# Altium PCB caton.PcbDoc (part 1 of 2)
Units mm, origin at the board's own origin, x right, y up, seen from the top; angles counter-clockwise.
Board outline 47.5 x 40.5 mm, 6 copper layers (Signal Layer 1, Signal Layer 2, Signal Layer 3, Signal Layer 4, Signal Layer 5, Signal Layer 6), stack 1.539 mm thick; 76 components, 74 nets, 365 pads, 138 vias.
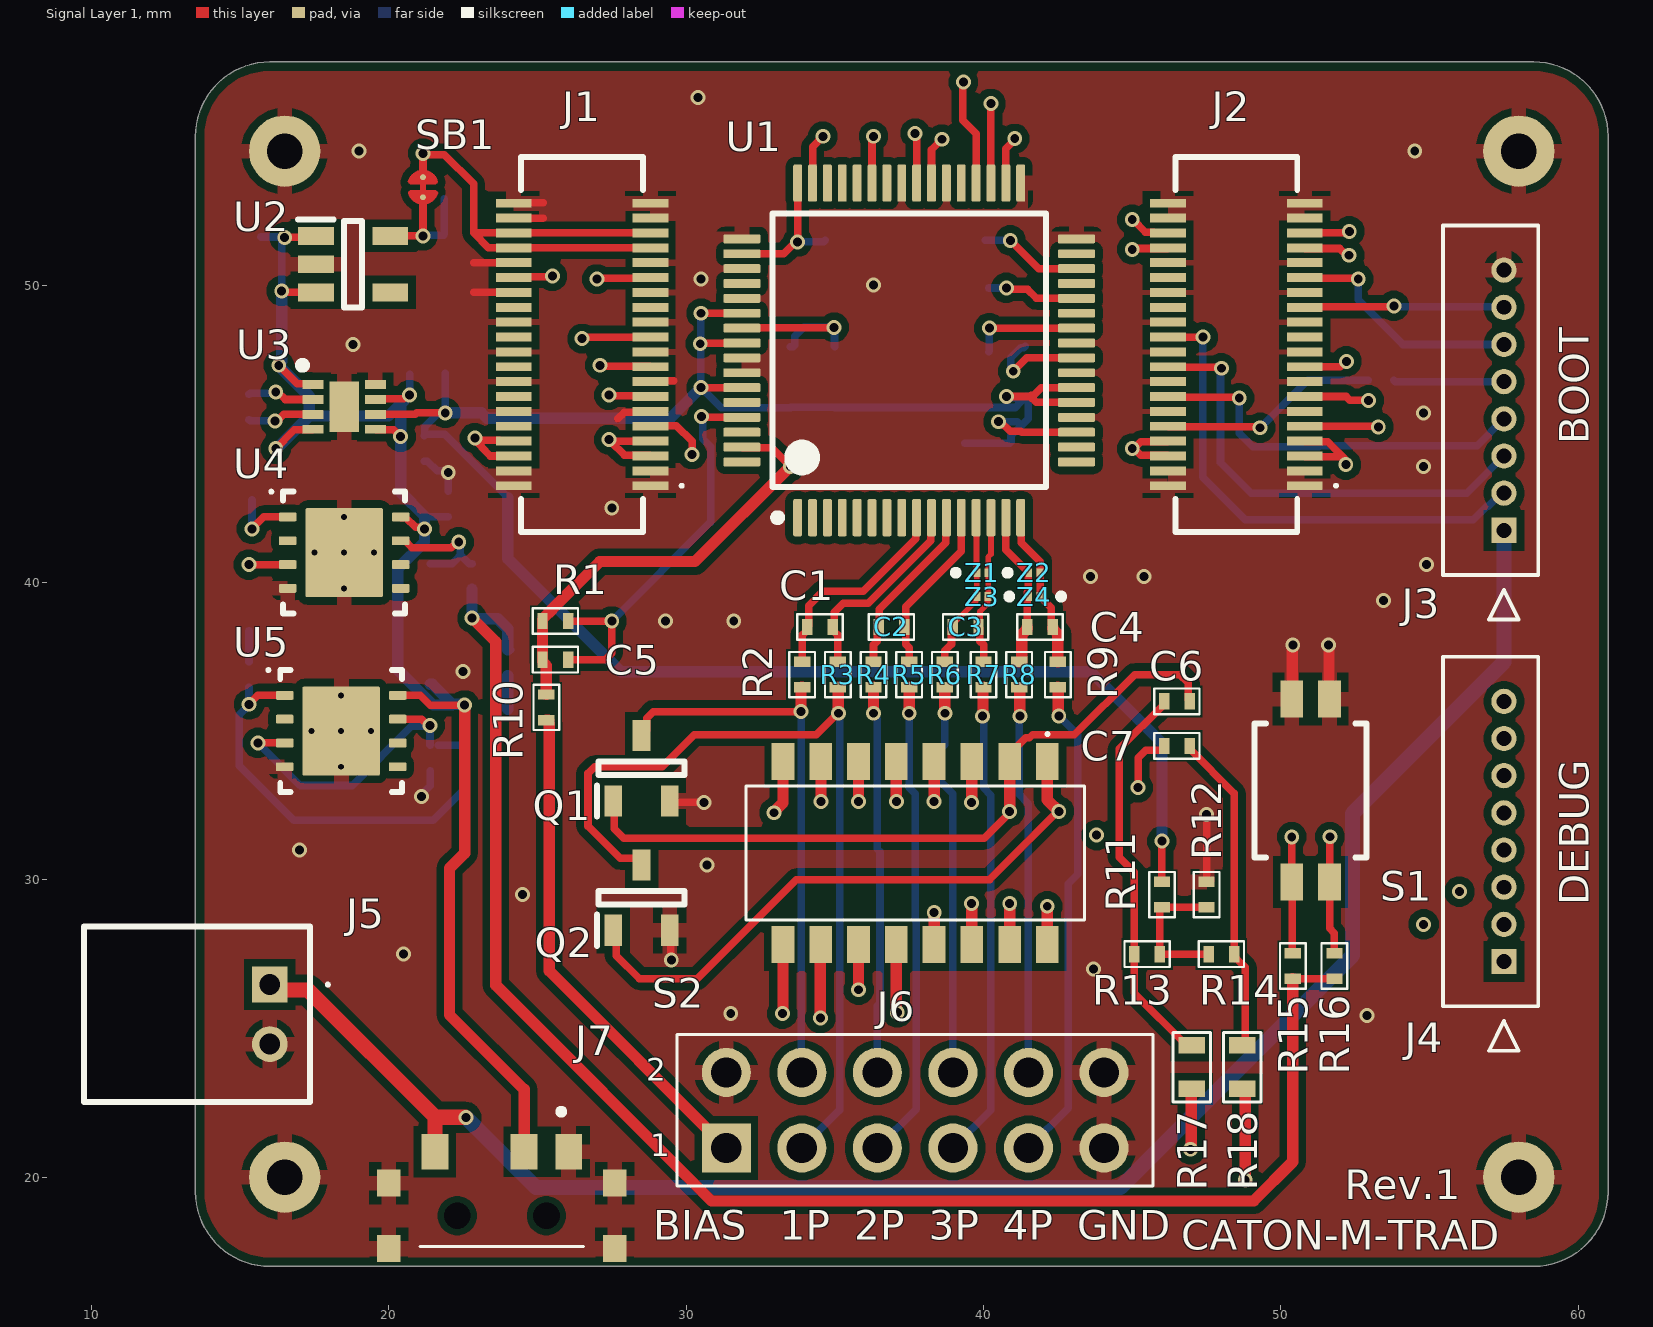
[diagram p0: Signal Layer 1 view]
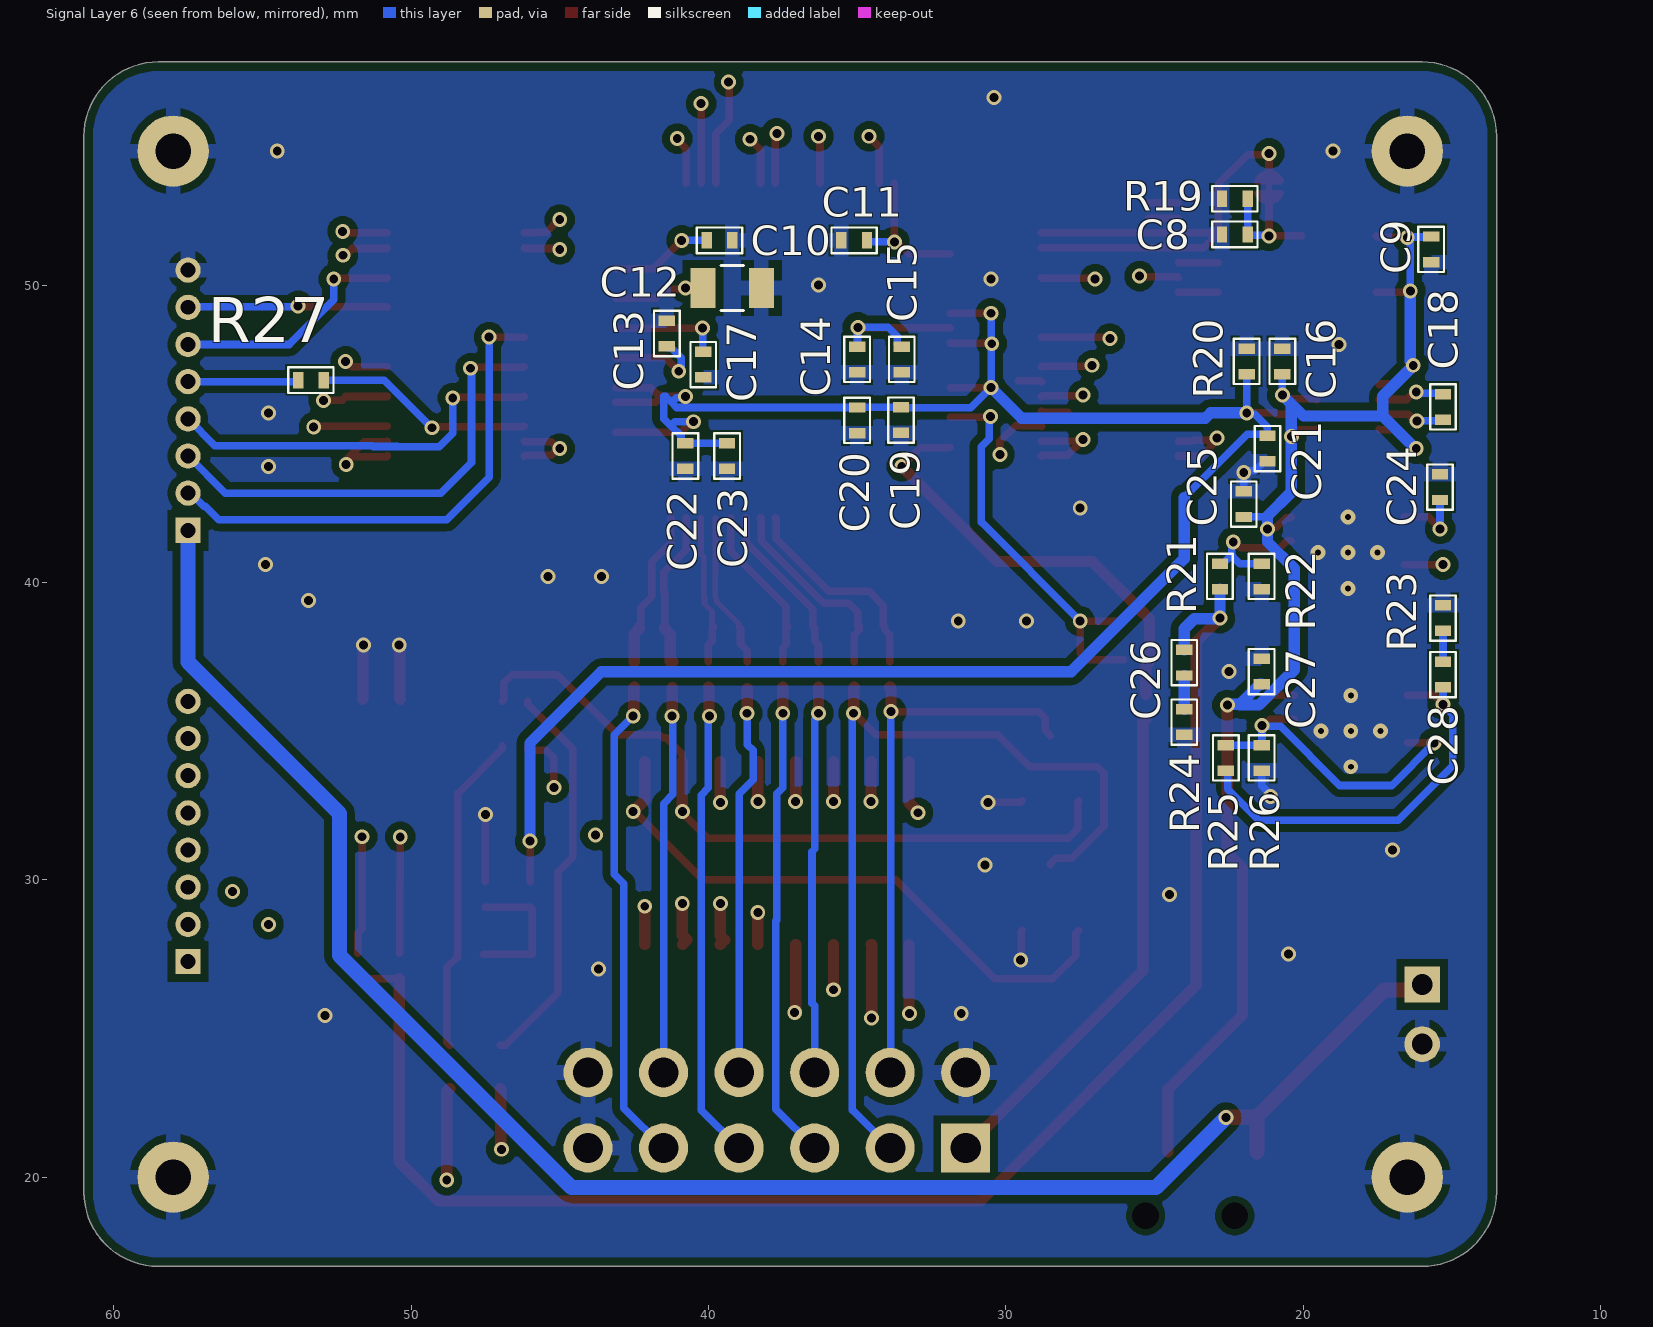
[diagram p1: Signal Layer 6 view, seen from below]
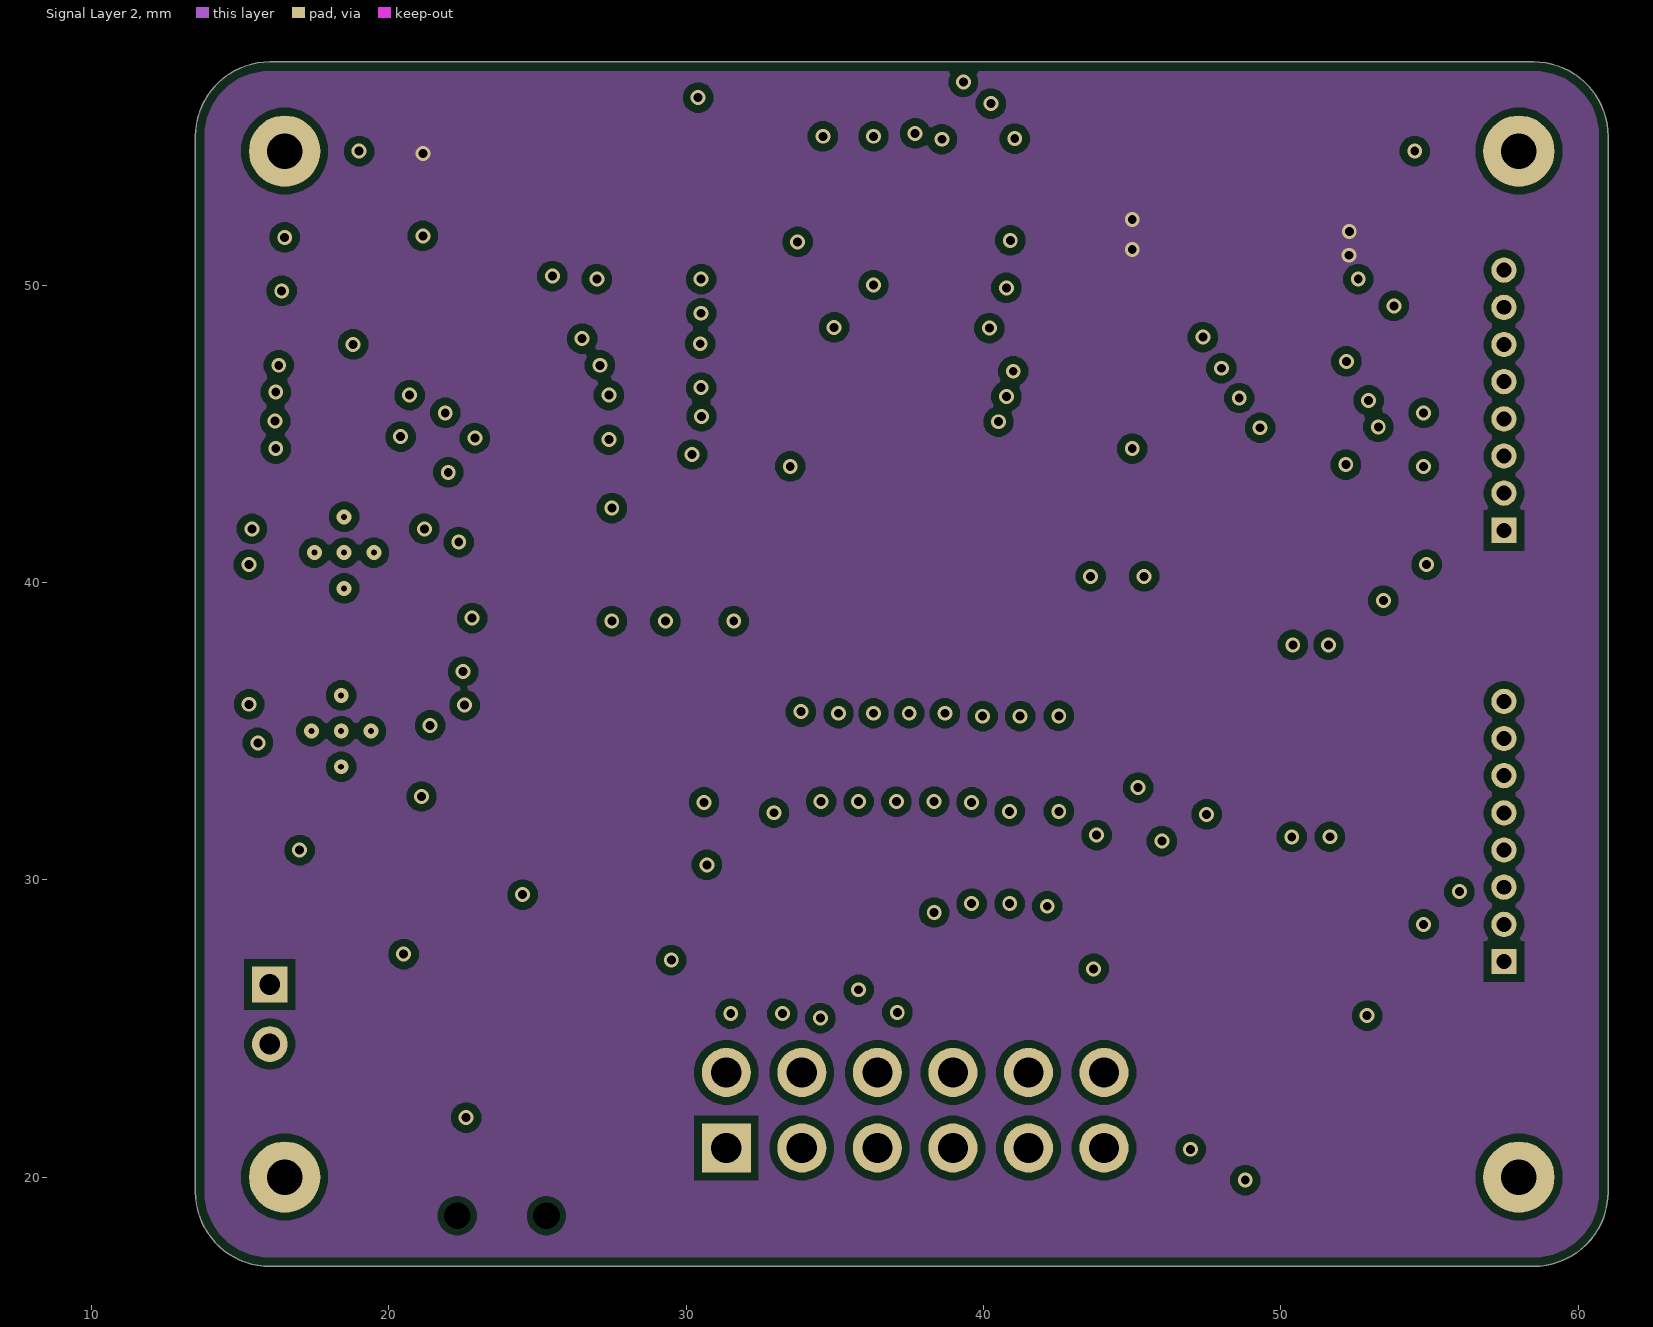
[diagram p2: Signal Layer 2]
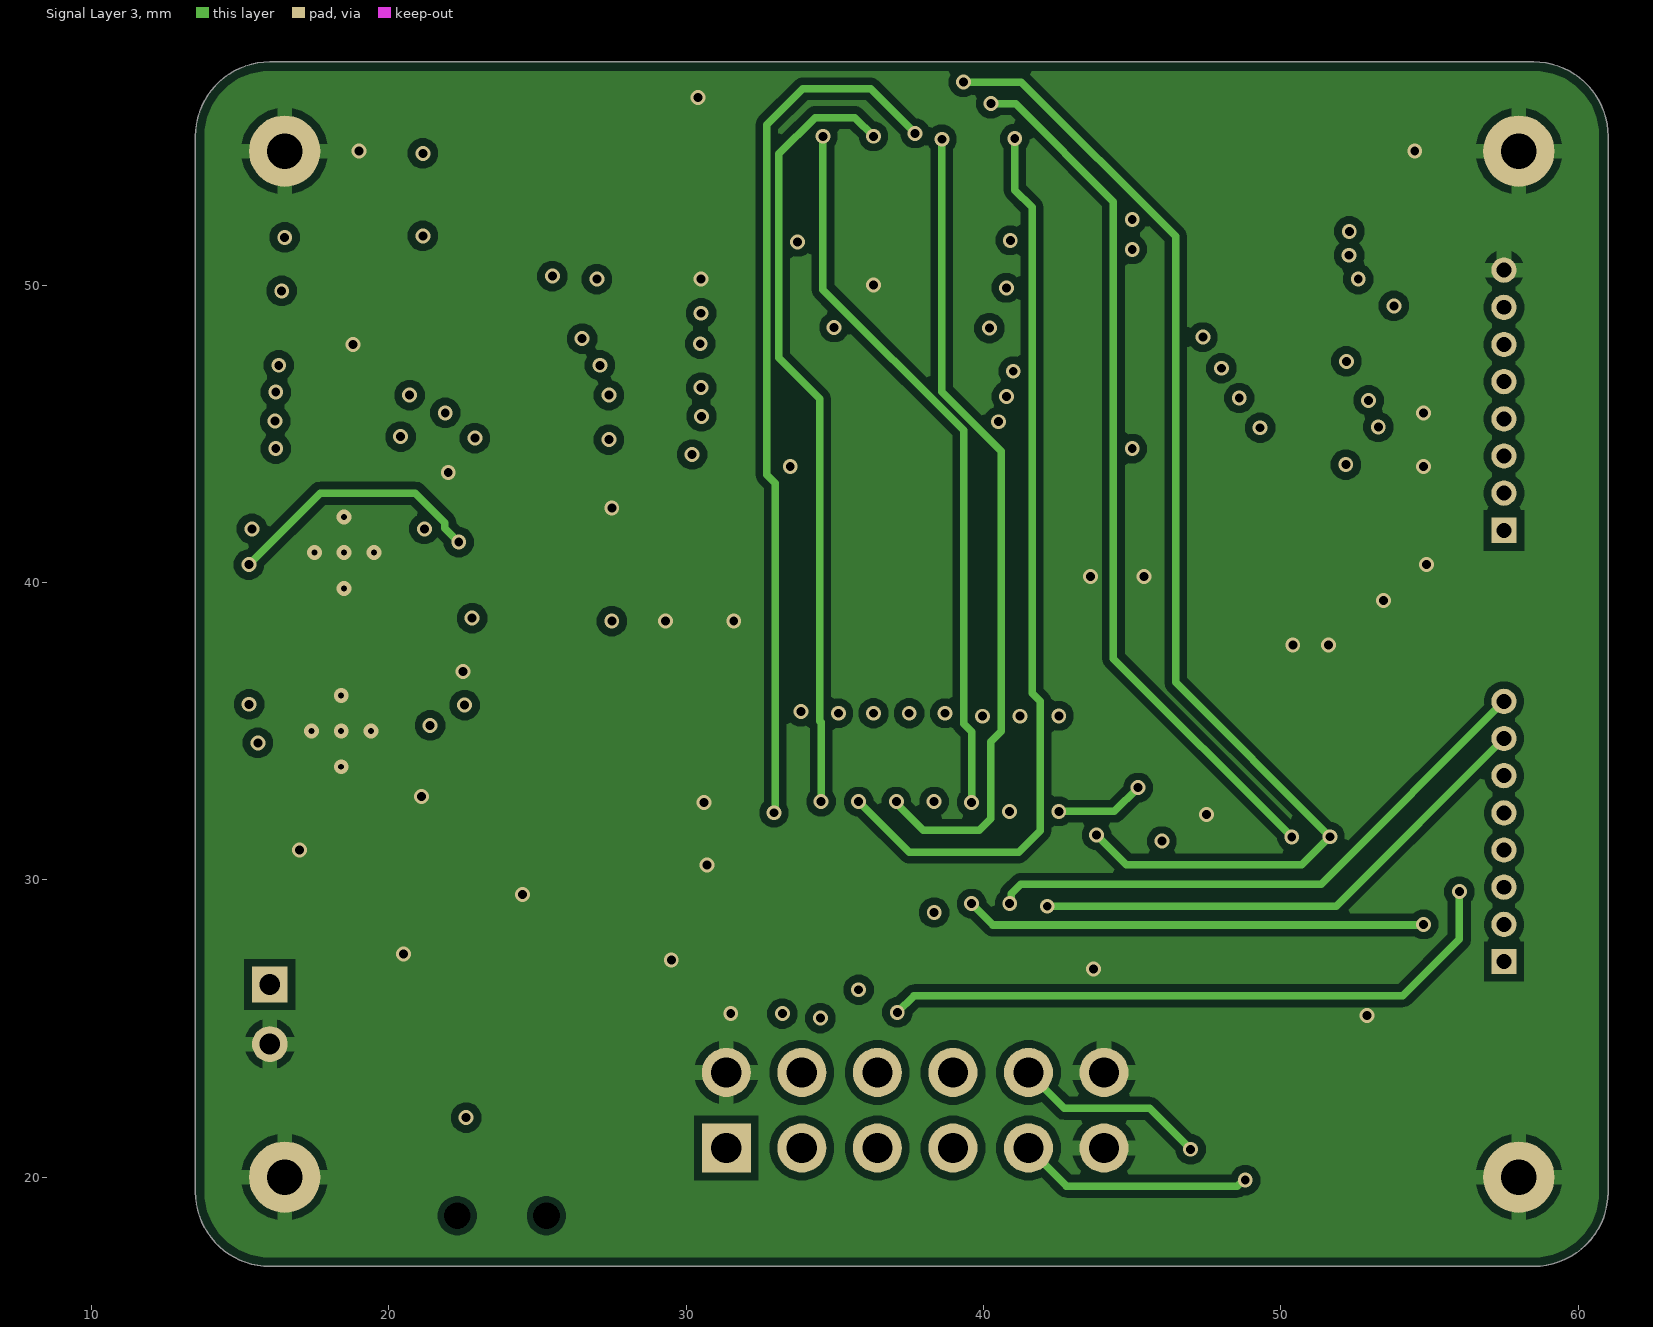
[diagram p3: Signal Layer 3]
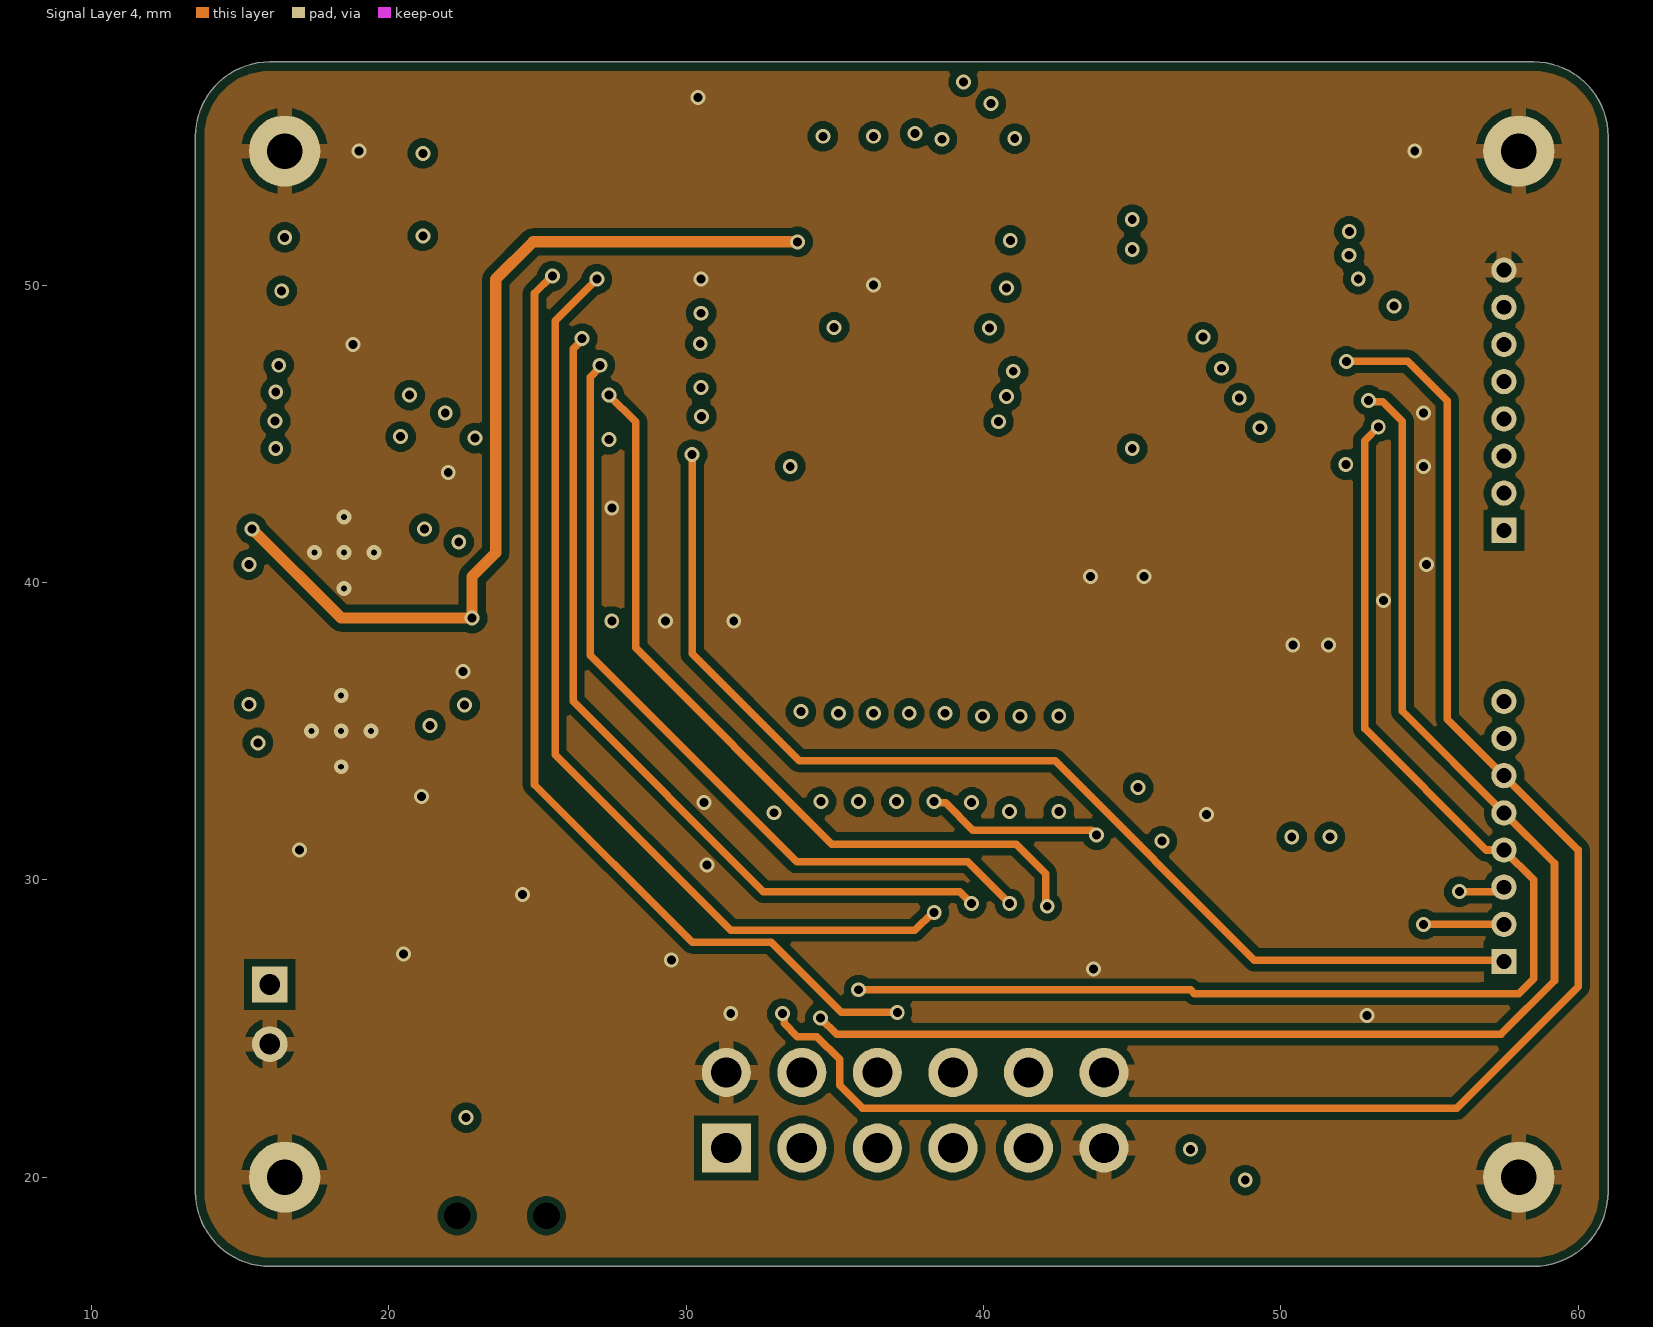
[diagram p4: Signal Layer 4]
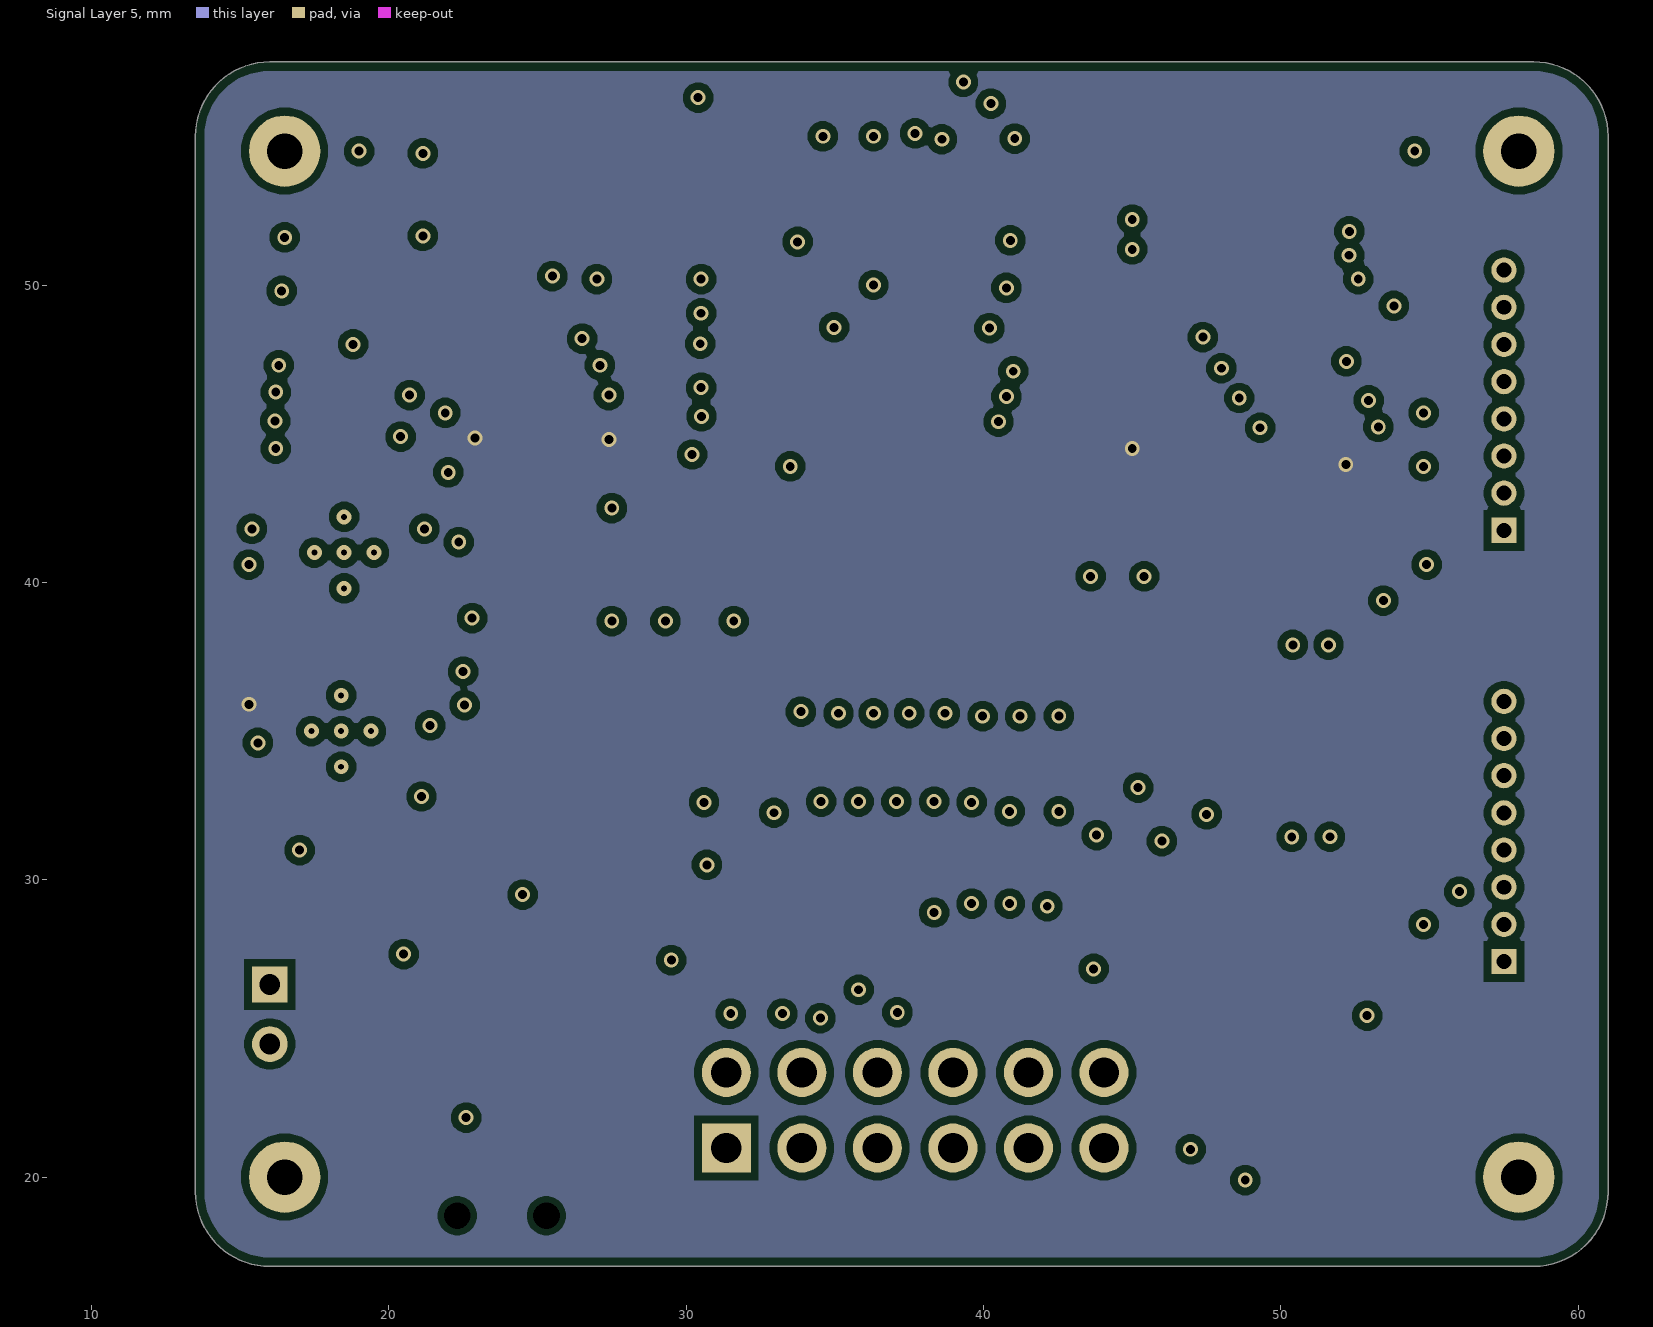
[diagram p5: Signal Layer 5]
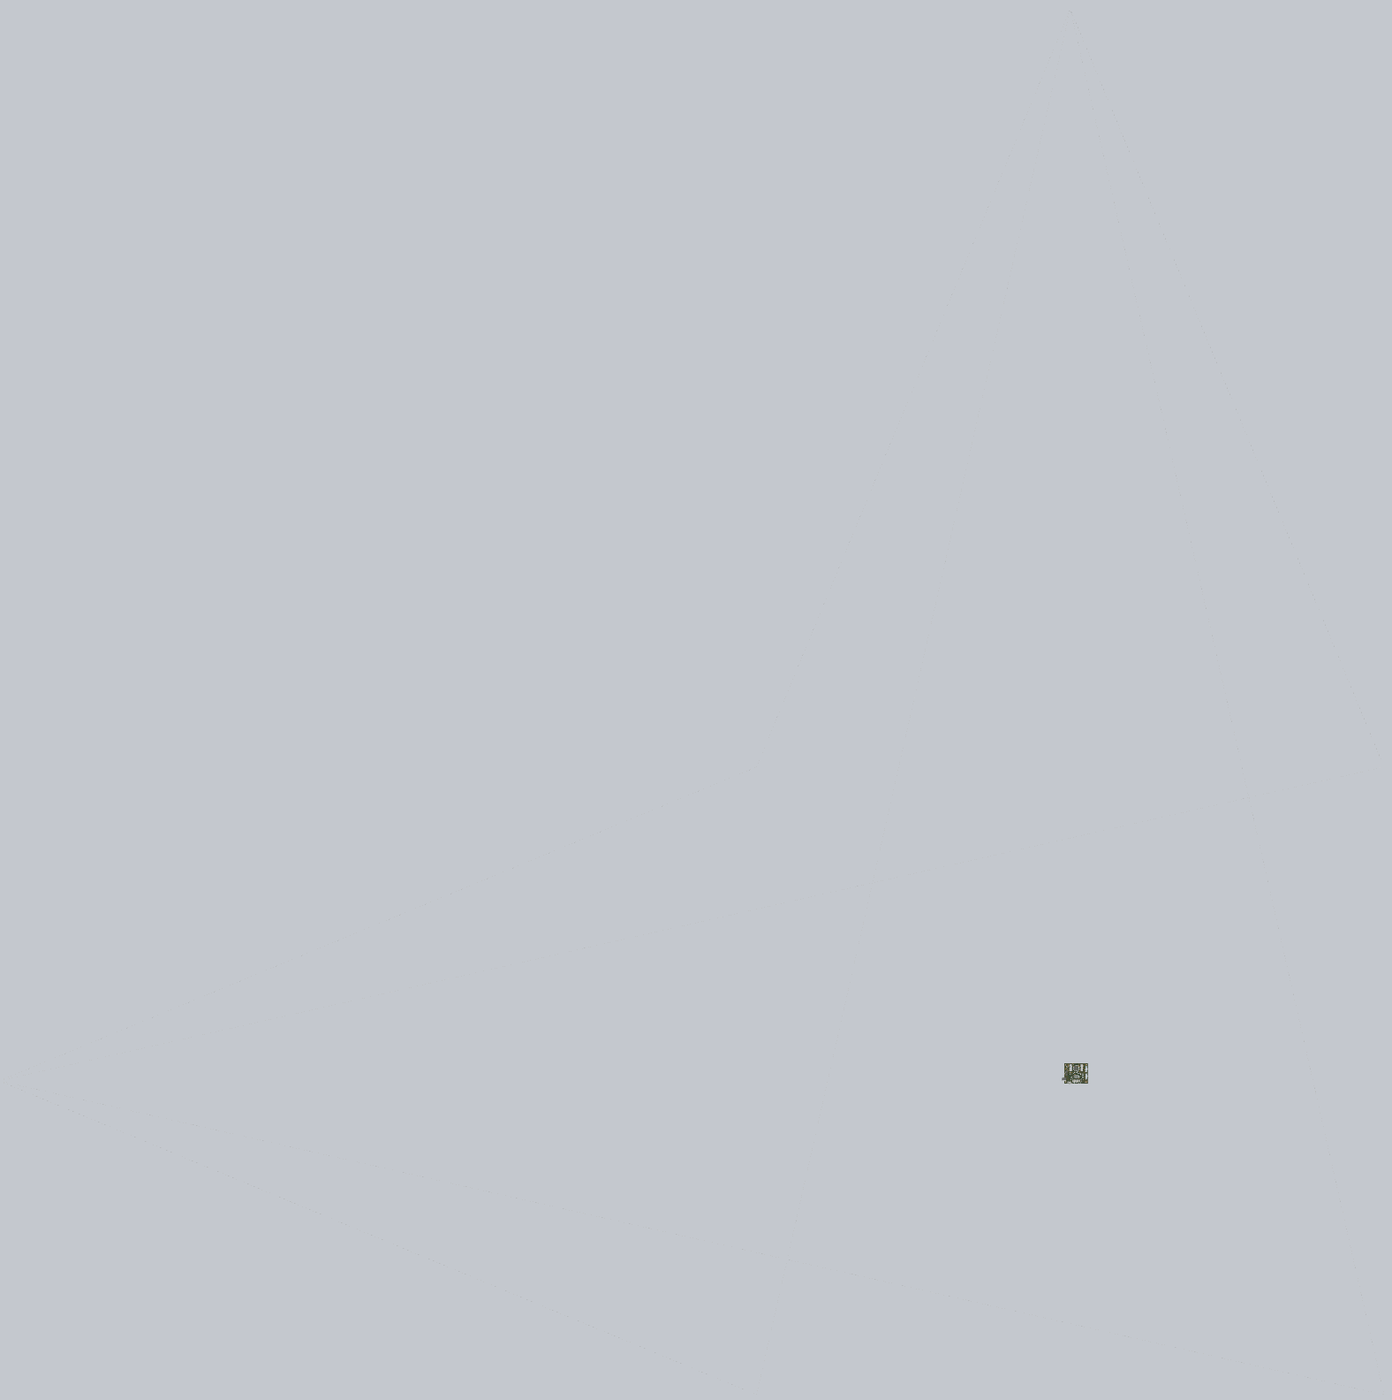
[diagram p6: 3D render of the assembled board from above, using the file's embedded part models]
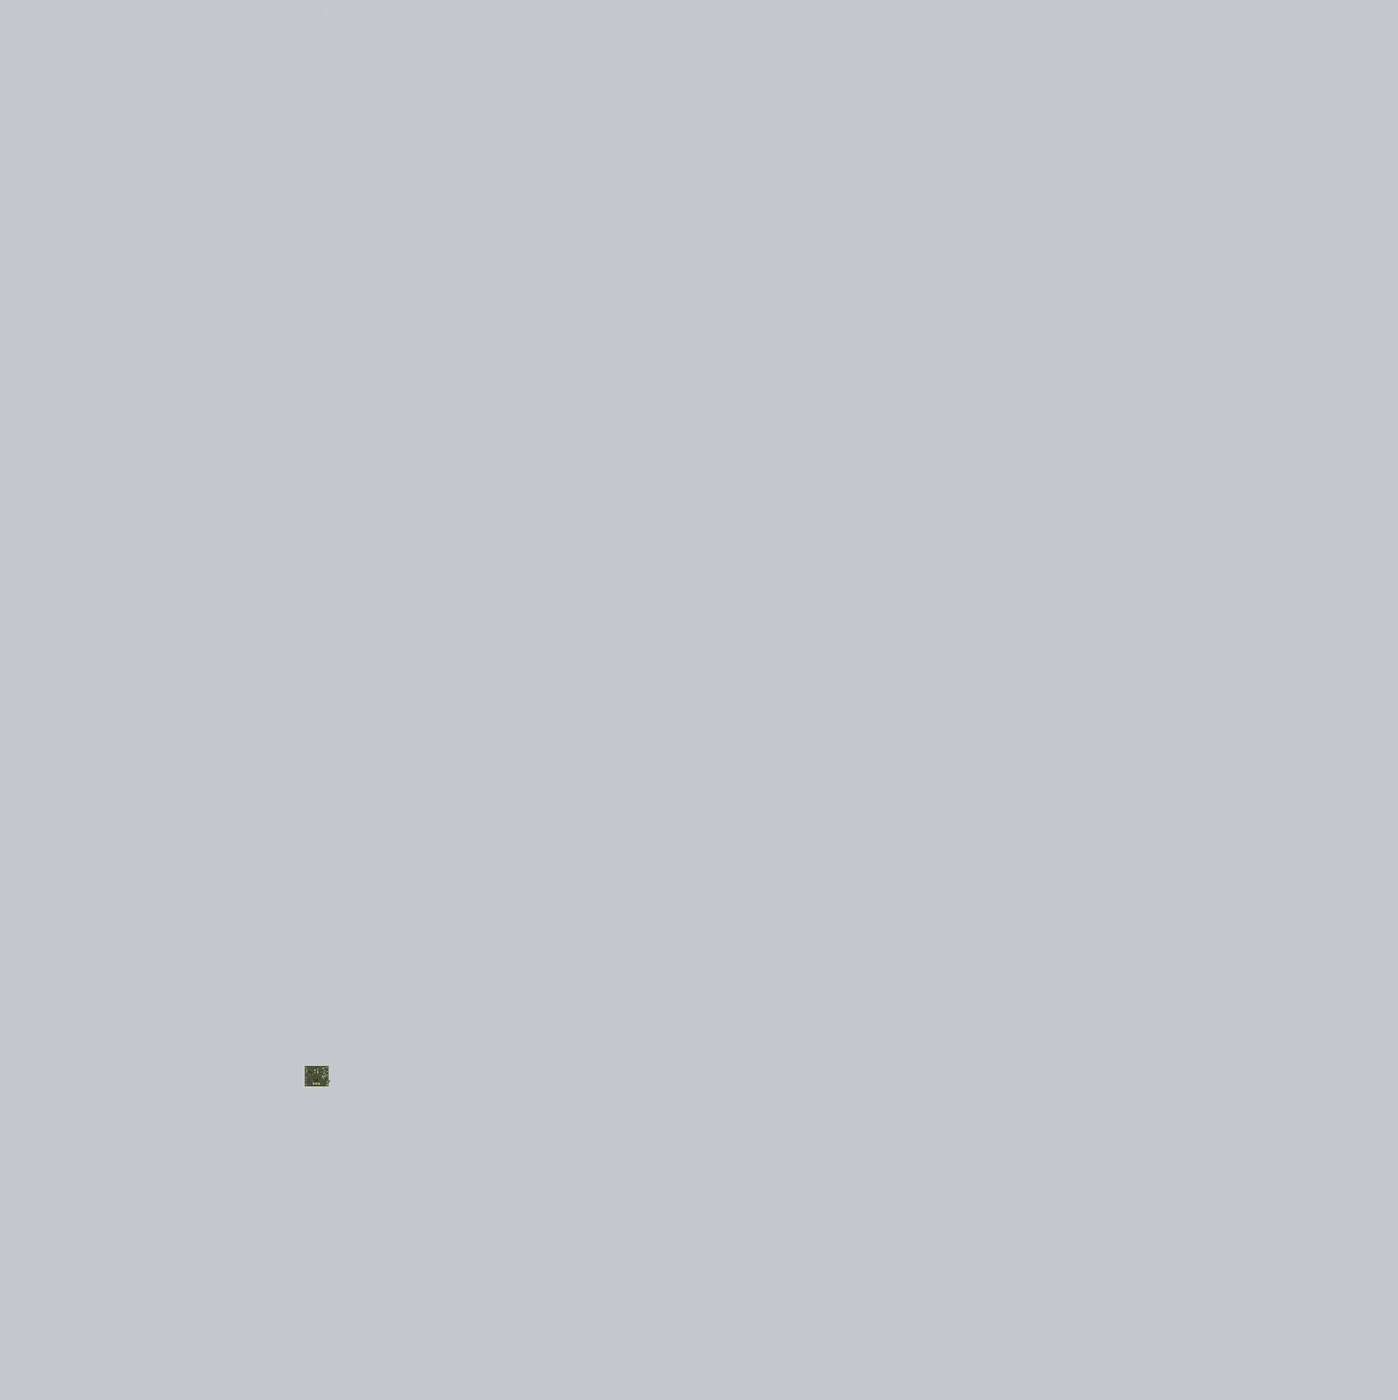
[diagram p7: 3D render of the assembled board from below, using the file's embedded part models]

## Layer stack, top to bottom
Top Mask: solder mask 0.0305, Solder Resist, Dk 3.8
Signal Layer 1: signal copper 0.035
Prepreg 1: prepreg 0.0994, 1080 RC69% 3.39mil, Dk 3.92
Signal Layer 2: signal copper 0.0152
Core 1: core 0.55, 0.25mm H/HOZ without copper, Dk 4.8
Signal Layer 3: signal copper 0.0152
Prepreg 2: prepreg 0.1088, 2313 RC58% 4.09mil, Dk 4.25
Signal Layer 4: signal copper 0.0152
Core 2: core 0.55, 0.25mm H/HOZ without copper, Dk 4.8
Signal Layer 5: signal copper 0.0152
Dielectric 4: prepreg 0.0994, 1080 RC69% 3.39mil, Dk 3.92
Signal Layer 6: signal copper 0.035
Board Layer Stack Bottom Solder: solder mask 0.0305, Solder Resist, Dk 3.8

## Board outline
13.5,19.5 13.5,55 cw(c16,55) 16,57.5 58.5,57.5 cw(c58.5,55) 61,55 61,19.5 cw(c58.5,19.5) 58.5,17 16,17 cw(c16,19.5)

## Design rules (kind name [scope] priority, off if disabled: settings)
BoardOutlineClearance [All] p1: gap=0.3 ignorepadtopadclearanceinfootprint=FALSE
Clearance SolderBridgeClearance [HasFootprint('Solderbridge')] p1: gap=0.254 ignorepadtopadclearanceinfootprint=TRUE except(0.13: SMDPad-Via THPad-Via; 0.15: Arc-Arc Arc-Track Arc-SMDPad Arc-Region Track-Track Track-SMDPad SMDPad-SMDPad Region-Region; 0.2: Arc-Hole Track-Hole SMDPad-Fill SMDPad-Poly SMDPad-Region THPad-Fill THPad-Poly THPad-Region THPad-Hole Fill-Fill Fill-Poly Fill-Region Fill-Hole Poly-Poly Poly-Region Poly-Hole Region-Hole Text-Hole; 0.33: Arc-THPad Track-THPad; 0.508: SMDPad-THPad THPad-THPad)
Clearance [All] p2: gap=0.254 ignorepadtopadclearanceinfootprint=TRUE except(0.13: SMDPad-Via THPad-Via; 0.15: Arc-Arc Arc-Track Arc-SMDPad Track-Track Track-SMDPad SMDPad-SMDPad; 0.2: Arc-Hole Track-Hole SMDPad-Fill SMDPad-Poly SMDPad-Region THPad-Fill THPad-Poly THPad-Region THPad-Hole Fill-Fill Fill-Poly Fill-Region Fill-Hole Poly-Poly Poly-Region Poly-Hole Region-Region Region-Hole Text-Hole; 0.508: SMDPad-THPad THPad-THPad)
Creepage [All] p1: checkdistance=0.254 applytopolygonpour=TRUE
DiffPairsRouting ControlledDiffPairsRouting [All] p1: maxlimit=0.508 minlimit=0.254 mostfreqgap=0.508 toplayer_maxgap=0.254 toplayer_prefgap=0.254 toplayer_minwidth=0.104 toplayer_maxwidth=0.104 toplayer_prefwidth=0.104 midlayer1_mingap=0.508 midlayer1_minwidth=0.096 midlayer1_maxwidth=0.096 midlayer1_prefwidth=0.096 midlayer2_minwidth=0.381 midlayer2_maxwidth=0.381 midlayer2_prefwidth=0.381 midlayer3_mingap=0.508 midlayer3_minwidth=0.096 midlayer3_maxwidth=0.096 midlayer3_prefwidth=0.096 midlayer4_minwidth=0.381 midlayer4_maxwidth=0.381 midlayer4_prefwidth=0.381 bottomlayer_maxgap=0.254 bottomlayer_prefgap=0.254 bottomlayer_minwidth=0.104 bottomlayer_maxwidth=0.104 bottomlayer_prefwidth=0.104 maxuncoupledlength=12.7
DiffPairsRouting [All] p2: maxlimit=0.254 minlimit=0.127 mostfreqgap=0.254 toplayer_minwidth=0.089 toplayer_maxwidth=0.381 toplayer_prefwidth=0.381 midlayer1_minwidth=0.089 midlayer1_maxwidth=0.381 midlayer1_prefwidth=0.381 midlayer2_minwidth=0.089 midlayer2_maxwidth=0.381 midlayer2_prefwidth=0.381 midlayer3_minwidth=0.089 midlayer3_maxwidth=0.381 midlayer3_prefwidth=0.381 midlayer4_minwidth=0.089 midlayer4_maxwidth=0.381 midlayer4_prefwidth=0.381 bottomlayer_minwidth=0.089 bottomlayer_maxwidth=0.381 bottomlayer_prefwidth=0.381 maxuncoupledlength=12.7
FanoutControl Fanout_BGA [IsBGA] p1: bgadir=Out bgaviamode=Centered fanoutstyle=UnderPads fanoutdirection=Alternating viagrid=0.025 // Fanout_BGA (Default Rule)
FanoutControl Fanout_Default [All] p5: bgadir=Out bgaviamode=Closest fanoutstyle=Auto fanoutdirection=Alternating viagrid=0.025 // Fanout_Default (Default Rule)
Height [All] p1: minheight=0 maxheight=8.48 prefheight=4.24
HoleSize [All] p1: absolutevalues=TRUE maxlimit=6.3 minlimit=0.15 maxpercent=80.000 minpercent=20.000
HoleToHoleClearance [All] p1: gap=0.5 allowstackedmicrovias=FALSE
Length [All] p1: maxlimit=2540 minlimit=0
MinimumAnnularRing [All] p1: minimumring=0.075
MinimumSolderMaskSliver [All] p1: minsoldermaskwidth=0.123
PlaneClearance [All] p1: clearance=0.254
PlaneConnect [All] p1: pad.planeconnectstyle=Relief pad.reliefexpansion=0.508 pad.reliefentries=4 pad.reliefconductorwidth=0.254 pad.reliefairgap=0.254 via.planeconnectstyle=Direct via.reliefexpansion=0.508 via.reliefentries=4 via.reliefconductorwidth=0.254 via.reliefairgap=0.254
PolygonConnect PolygonConnectRFPads [(InComponentClass('RF Components')) vs InNet('GND')] p1: connectstyle=Direct reliefconductorwidth=0.508 reliefentries=4 polygonreliefangle="90 Angle" airgapwidth=0.254
PolygonConnect PolygonConnectDefault [All] p2: thpad.connectstyle=Relief thpad.reliefconductorwidth=0.508 thpad.reliefentries=4 thpad.polygonreliefangle="90 Angle" thpad.airgapwidth=0.254 smdpad.connectstyle=Relief smdpad.reliefconductorwidth=0.508 smdpad.reliefentries=4 smdpad.polygonreliefangle="90 Angle" smdpad.airgapwidth=0.254 via.connectstyle=Direct via.reliefconductorwidth=0.508 via.reliefentries=4 via.polygonreliefangle="90 Angle" via.airgapwidth=0.254
RoutingCorners ControlCorners [InNetClass('Controlled Impedance')] p1: cornerstyle=Round minsetback=2.54 maxsetback=2.54
RoutingCorners [All] p2: cornerstyle=45-Degree minsetback=2.54 maxsetback=2.54
RoutingPriority ControlPriority [All] p1: routingpriority=3
RoutingPriority PowerPriority [InNetClass('Power')] p2: routingpriority=2
RoutingVias [All] p1: holewidth=0.15 width=0.25 viastyle="Through Hole" minholewidth=0.15 minwidth=0.25 maxholewidth=1 maxwidth=2 useviatemplates=TRUE viatemplateguid#1={E253EDD0-7A6D-4760-96B0-29BD2F5F0492} viatemplatename#1=v50h30
SilkToSilkClearance [All] p1: silktosilkclearance=0.1
SilkToSolderMaskClearance [IsPad] p1: minsilkscreentomaskgap=0.025 clearancetoexposedcopper=TRUE
SolderMaskExpansion BGASolderMaskExpansion [ViaDiameter <= 0.5] p1: expansion=0.102 istentingtop=TRUE
SolderMaskExpansion [All] p2: expansion=0.038 istentingtop=FALSE
SupplyNets "Schematic Supply Nets_5" [InNet('+EXT_BAT_SW')] p1: voltage=0.000
SupplyNets "Schematic Supply Nets_3" [InNet('+EXT_BAT')] p2: voltage=0.000
SupplyNets "Schematic Supply Nets_2" [InNet('+5V_ADS1299')] p3: voltage=0.000
SupplyNets "Schematic Supply Nets_1" [InNet('+1.8V_ADS1299')] p4: voltage=0.000
SupplyNets "Schematic Supply Nets" [InNet('GND')] p5: voltage=0.000
SupplyNets "Schematic Supply Nets_6" [InNet('+1.8V_SCUM')] p6: voltage=0.000
SupplyNets "Schematic Supply Nets_4" [InNet('+1.1V_SCUM')] p7: voltage=0.000
UnRoutedNet [All] p1: checkbadconnections=TRUE
ViasUnderSMD [All] p1: allowed=TRUE
Width ControlWidth [InNetClass('Controlled Impedance') AND NOT(InAnyDifferentialPair)] p1: maxlimit=0.122 minlimit=0.092 preferedwidth=0.097 toplayer_minwidth=0.122 toplayer_prefwidth=0.122 midlayer1_minwidth=0.097 midlayer1_maxwidth=0.097 midlayer3_minwidth=0.097 midlayer3_maxwidth=0.097 bottomlayer_minwidth=0.122 bottomlayer_prefwidth=0.122 minimp=50.000000 maximp=50.000000 favimp=50.000000
Width BGARoomWidth [WithinRoom('BGARoom')] p2: maxlimit=0.13 minlimit=0.089 preferedwidth=0.127 toplayer_minwidth=0.13 toplayer_prefwidth=0.13 midlayer1_maxwidth=0.127 midlayer2_maxwidth=0.127 midlayer3_maxwidth=0.127 midlayer4_maxwidth=0.127 bottomlayer_minwidth=0.13 bottomlayer_prefwidth=0.13 minimp=50.000000 maximp=50.000000 favimp=50.000000
Width PowerWidth [InNetClass('Power')] p3: maxlimit=2.54 minlimit=0.089 preferedwidth=0.254 toplayer_minwidth=0.13 bottomlayer_minwidth=0.13 minimp=50.000000 maximp=50.000000 favimp=50.000000
Width [All] p4: maxlimit=2.54 minlimit=0.089 preferedwidth=0.254 toplayer_minwidth=0.13 bottomlayer_minwidth=0.13 minimp=50.000000 maximp=50.000000 favimp=50.000000
16 further rules are at their usual default settings.

## Components (designator, comment, footprint, x,y, rotation, side; value= is the part's Value field where it differs from the comment)
C1 "3.3 uF" 0402 34.5,38.5 r0 top (schematic designator C19)
C2 "3.3 uF" 0402 36.9,38.5 r0 top (schematic designator C11)
C3 "3.3 uF" 0402 39.4,38.5 r0 top (schematic designator C8)
C4 "3.3 uF" 0402 41.9,38.5 r0 top
C5 "10 nF" 0402 25.6,37.4 r180 top (schematic designator C12)
C6 "3.3 uF" 0402 46.5,36 r180 top (schematic designator C5)
C7 "3.3 uF" 0402 46.5,34.5 r0 top (schematic designator C1)
C8 "0.1 uF" 0402 22.3,51.7 r180 bottom (schematic designator C27)
C9 "1 uF" 0402 15.7,51.2 r90 bottom (schematic designator C25)
C10 "1.0 uF" 0402 39.63,51.5 r180 bottom (schematic designator C15)
C11 "100 nF" 0402 35.1,51.5 r0 bottom (schematic designator C9)
C12 "100 uF" 0805 39.2,49.9 r180 bottom (schematic designator C14)
C13 "10 uF" 0402 41.4,48.37 r90 bottom
C14 "1.0 uF" 0402 35,47.5 r270 bottom (schematic designator C17)
C15 "100 nF" 0402 33.5,47.5 r270 bottom (schematic designator C16)
C16 "10 uF" 0402 20.7,47.43 r90 bottom (schematic designator C20)
C17 "1.0 uF" 0402 40.175,47.325 r270 bottom (schematic designator C18)
C18 "1 uF" 0402 15.3,45.9 r90 bottom (schematic designator C22)
C19 "100 nF" 0402 33.525,45.455 r270 bottom (schematic designator C2)
C20 "1.0 uF" 0402 35,45.45 r270 bottom (schematic designator C3)
C21 "10 uF" 0402 21.2,44.5 r270 bottom (schematic designator C28)
C22 "1.0 uF" 0402 40.775,44.25 r270 bottom (schematic designator C7)
C23 "100 nF" 0402 39.375,44.25 r270 bottom (schematic designator C6)
C24 "1.0 uF" 0402 15.4,43.2 r90 bottom (schematic designator C10)
C25 "1 uF" 0402 22,42.63 r90 bottom (schematic designator C23)
C26 "4.7 uF" 0402 24,37.3 r270 bottom (schematic designator C24)
C27 "1 uF" 0402 21.4,37 r90 bottom (schematic designator C21)
C28 "4.7 uF" 0402 15.3,36.9 r90 bottom (schematic designator C26)
J1 "54102-0404" 541020404 26.5,48 r90 top (schematic designator J4)
J2 "54102-0404" 541020404 48.5,48 r90 top (schematic designator J5)
J3 "530470810" 530470810 57.5,41.75 r270 top (schematic designator J2)
J4 "530470810" 530470810 57.5,27.25 r270 top (schematic designator J3)
J5 "S2B-PH-KL_LF__SN_" S2BPHKLLFSN 16,26.475 r90 top (schematic designator J6)
J6 "CON_012pin_2x6" CON-012-100-600X200/2X6-POST 37.7,22.25 r0 top (schematic designator J1)
J7 "SK-3296S-01-L1" SK3296S01L1 23.8,19.95 r0 top
Q1 "BSS138BKVL" SOT95P230X110-3N 28.5,33.75 r90 top (schematic designator Q2)
Q2 "BSS138BKVL" SOT95P230X110-3N 28.5,29.4 r90 top (schematic designator Q1)
R1 "390k" 0402 25.6,38.7 r0 top value=390K (schematic designator R13)
R2 "200" 0402 33.9,36.9 r90 top (schematic designator R16)
R3 "200" 0402 35.1,36.9 r90 top (schematic designator R14)
R4 "200" 0402 36.3,36.9 r90 top (schematic designator R12)
R5 "200" 0402 37.5,36.9 r90 top (schematic designator R11)
R6 "200" 0402 38.7,36.9 r90 top (schematic designator R10)
R7 "200" 0402 40,36.9 r90 top (schematic designator R9)
R8 "200" 0402 41.2,36.9 r90 top (schematic designator R7)
R9 "200" 0402 42.5,36.9 r90 top (schematic designator R1)
R10 "5.1K" 0402 25.3,35.8 r90 top (schematic designator R15)
R11 "100K" 0402 46,29.5 r90 top (schematic designator R4)
R12 "100K" 0402 47.5,29.5 r270 top (schematic designator R6)
R13 "100K" 0402 45.5,27.5 r0 top (schematic designator R5)
R14 "100K" 0402 48,27.5 r0 top (schematic designator R3)
R15 "10K" 0402 50.4,27.1 r90 top (schematic designator R17)
R16 "10K" 0402 51.8,27.1 r90 top (schematic designator R18)
R17 "0" 0603 47,23.7 r270 top (schematic designator R8)
R18 "0" 0603 48.7,23.7 r270 top (schematic designator R2)
R19 "100K" 0402 22.3,52.9 r180 bottom (schematic designator R21)
R20 "100K" 0402 21.9,47.43 r270 bottom (schematic designator R22)
R21 "46K" 0402 22.8,40.2 r270 bottom (schematic designator R19)
R22 "100K" 0402 21.4,40.2 r90 bottom (schematic designator R23)
R23 "1" 0402 15.3,38.8 r270 bottom (schematic designator R26)
R24 "1" 0402 24,35.3 r90 bottom
R25 "46K" 0402 22.6,34.1 r270 bottom (schematic designator R20)
R26 "100K" 0402 21.4,34.1 r90 bottom (schematic designator R25)
R27 "10" 0402 53.37,46.8 r0 bottom
S1 "DHN-02F-V-T_R" DHN02FVTR 51,33 r0 top (schematic designator S2)
S2 "DHN-08F-T-V-T_R" DHN08FTVTR 37.7,30.9 r180 top locked (schematic designator S1)
SB1 "Shorted" Solderbridge_Shorted 21.15,53.288 r90 top net-tie
U1 "ADS1299IPAG" PAG0064A_L 37.5,47.8 r90 top locked
U2 "TLV71311PDBVR" SOT95P280X145-5N 18.8,50.7 r0 top (schematic designator U5)
U3 "LM2775DSGR" SON50P200X200X80-9N 18.5,45.9 r0 top
U4 "LP2951ACSD/NOPB" NGT0008A_V 18.5,41 r0 top (schematic designator U2)
U5 "LP2951ACSD/NOPB" NGT0008A_V 18.4,35 r0 top (schematic designator U4)
Z1 "GDZ5V1LP3-7" GDZ3V3LP37 39.62,40.325 r0 top (schematic designator Z3)
Z2 "GDZ5V1LP3-7" GDZ3V3LP37 41.365,40.325 r0 top (schematic designator Z1)
Z3 "GDZ5V1LP3-7" GDZ3V3LP37 40.31,39.525 r180 top (schematic designator Z4)
Z4 "GDZ5V1LP3-7" GDZ3V3LP37 42.055,39.525 r180 top (schematic designator Z2)

## Footprints (in the part's own frame and the unit in brackets; to place one, negate y for a bottom-side part, rotate by r counter-clockwise, add the part's x,y. Pads: shape width x height; smd on the part's side, far side on the other; paste and mask are expansions set on the pad)
0402 [mm]
  rect 0.35x0.55 smd mask+0: 1(-0.43,0) 2(0.43,0)
  silkscreen extent -0.76,-0.43 0.76,0.43, body extent -0.5,-0.25 0.5,0.25, height 0.36
0603 [mm]
  rect 0.55x0.9 smd mask+0: 1(-0.73,0) 2(0.73,0)
  silkscreen extent -1.17,-0.64 1.17,0.64, body extent -0.76,-0.38 0.76,0.38, height 0.79
0805 [mm]
  rect 0.85x1.35 smd mask+0: 1(-0.98,0) 2(0.98,0)
  silkscreen extent -0.38,-0.76 0.38,0.76, body extent -1,-0.63 1,0.63, height 0.95
530470810 [mm]
  rect 0.85x0.85 hole 0.5: 1(0,0)
  round 0.85 hole 0.5: 2(-1.25,0) 3(-2.5,0) 4(-3.75,0) 5(-5,0) 6(-6.25,0) 7(-7.5,0) 8(-8.75,0)
  silkscreen extent -10.25,-2.05 3,1.15, body extent -10.22,-1.1 1.53,2.1, height 4
541020404 [mm]
  rect 0.3x1.2 smd: 1(-4.75,-2.3) 2(-4.75,2.3) 3(-4.25,-2.3) 4(-4.25,2.3) 5(-3.75,-2.3) 6(-3.75,2.3) 7(-3.25,-2.3) 8(-3.25,2.3) 9(-2.75,-2.3) 10(-2.75,2.3) 11(-2.25,-2.3) 12(-2.25,2.3) 13(-1.75,-2.3) 14(-1.75,2.3) 15(-1.25,-2.3) 16(-1.25,2.3) 17(-0.75,-2.3) 18(-0.75,2.3) 19(-0.25,-2.3) 20(-0.25,2.3) 21(0.25,-2.3) 22(0.25,2.3) 23(0.75,-2.3) 24(0.75,2.3) 25(1.25,-2.3) 26(1.25,2.3) 27(1.75,-2.3) 28(1.75,2.3) 29(2.25,-2.3) 30(2.25,2.3) 31(2.75,-2.3) 32(2.75,2.3) 33(3.25,-2.3) 34(3.25,2.3) 35(3.75,-2.3) 36(3.75,2.3) 37(4.25,-2.3) 38(4.25,2.3) 39(4.75,-2.3) 40(4.75,2.3)
  silkscreen extent -6.3,-3.4 6.3,2.05, body extent -6.3,-2.65 6.3,2.65, height 2.1
CON-012-100-600X200/2X6-POST [mil]
  rect 65x65 hole 40 mask+0: 1(-250,-50)
  round 65 hole 40 mask+0: 2(-250,50.01) 3(-150,-50) 4(-150,50.01) 5(-50,-50) 6(-50,50.01) 7(50.01,-50) 8(50.01,50.01) 9(150.01,-50) 10(150.01,50.01) 11(250.01,-50) 12(250.01,50.01)
  silkscreen extent -315,-100 315,100, body extent -300,-100 300,100, height 330
DHN02FVTR [mm]
  rect 0.76x1.25 smd: A1(-0.635,-3.075) A2(0.635,-3.075) B1(-0.635,3.075) B2(0.635,3.075)
  silkscreen extent -1.89,-2.25 1.89,2.25, body extent -1.9,-3.35 1.9,3.35, height 1.6
DHN08FTVTR [mm]
  rect 0.76x1.25 smd: 1(-4.445,-3.075) 2(-4.445,3.075) 3(-3.175,-3.075) 4(-3.175,3.075) 5(-1.905,-3.075) 6(-1.905,3.075) 7(-0.635,-3.075) 8(-0.635,3.075) 9(0.635,-3.075) 10(0.635,3.075) 11(1.905,-3.075) 12(1.905,3.075) 13(3.175,-3.075) 14(3.175,3.075) 15(4.445,-3.075) 16(4.445,3.075)
  silkscreen extent -5.7,-4.05 5.7,2.25, body extent -5.7,-3.35 5.7,3.35, height 1.57
GDZ3V3LP37 [mm]
  rect 0.23x0.3 smd: 1(0.155,0) 2(0.535,0)
  silkscreen extent -0.65,-0.1 -0.46,0.1, body extent 0.04,-0.17 0.65,0.17, height 0.31
NGT0008A_V [mm] "SON, 8-Leads, Body 4x4mm, Pitch 0.8mm, Thermal Pad 2.6x3mm"
  rrect33% 0.6x0.3 smd: 1(-1.9,1.2) 2(-1.9,0.4) 3(-1.9,-0.4) 4(-1.9,-1.2) 5(1.9,-1.2) 6(1.9,-0.4) 7(1.9,0.4) 8(1.9,1.2)
  rrect4% 2.6x3 smd paste-1.3: 9(0,0)
  silkscreen extent -2.5,-2.05 2.05,2.1, body extent -2,-2 2,2, height 0.81
PAG0064A_L [mm] "QFP, 64-Leads, Body 10x10mm, Pitch 0.5mm, IPC High Density"
  rrect33% 1.25x0.3 smd: 1(-5.625,3.75) 2(-5.625,3.25) 3(-5.625,2.75) 4(-5.625,2.25) 5(-5.625,1.75) 6(-5.625,1.25) 7(-5.625,0.75) 8(-5.625,0.25) 9(-5.625,-0.25) 10(-5.625,-0.75) 11(-5.625,-1.25) 12(-5.625,-1.75) 13(-5.625,-2.25) 14(-5.625,-2.75) 15(-5.625,-3.25) 16(-5.625,-3.75) 33(5.625,-3.75) 34(5.625,-3.25) 35(5.625,-2.75) 36(5.625,-2.25) 37(5.625,-1.75) 38(5.625,-1.25) 39(5.625,-0.75) 40(5.625,-0.25) 41(5.625,0.25) 42(5.625,0.75) 43(5.625,1.25) 44(5.625,1.75) 45(5.625,2.25) 46(5.625,2.75) 47(5.625,3.25) 48(5.625,3.75)
  rrect33% 0.3x1.25 smd: 17(-3.75,-5.625) 18(-3.25,-5.625) 19(-2.75,-5.625) 20(-2.25,-5.625) 21(-1.75,-5.625) 22(-1.25,-5.625) 23(-0.75,-5.625) 24(-0.25,-5.625) 25(0.25,-5.625) 26(0.75,-5.625) 27(1.25,-5.625) 28(1.75,-5.625) 29(2.25,-5.625) 30(2.75,-5.625) 31(3.25,-5.625) 32(3.75,-5.625) 49(3.75,5.625) 50(3.25,5.625) 51(2.75,5.625) 52(2.25,5.625) 53(1.75,5.625) 54(1.25,5.625) 55(0.75,5.625) 56(0.25,5.625) 57(-0.25,5.625) 58(-0.75,5.625) 59(-1.25,5.625) 60(-1.75,5.625) 61(-2.25,5.625) 62(-2.75,5.625) 63(-3.25,5.625) 64(-3.75,5.625)
  silkscreen extent -5.75,-4.6 4.6,4.6, body extent -6,-6 6,6, height 1.09
S2BPHKLLFSN [mm]
  rect 1.2x1.2 hole 0.7: 1(0,0)
  round 1.2 hole 0.7: 2(-2,0)
  silkscreen extent -3.95,-2 1.95,6.25, body extent -3.95,-1.35 1.95,6.25, height 4.9
SK3296S01L1 [mm]
  rect 0.9x1.2 smd: 1(2.25,0.9) 2(0.75,0.9) 3(-2.25,0.9)
  round 0.45 hole 0.9 unplated: MH1(-1.5,-1.25) MH2(1.5,-1.25)
  rect 0.8x0.9 smd: MP1(-3.8,-0.15) MP2(3.8,-0.15) MP3(3.8,-2.35) MP4(-3.8,-2.35)
  silkscreen extent -2.75,-2.27 2.75,2.35, body extent -3.9,-4.13 3.9,1.12, height 1.35
Solderbridge_Shorted [mm]
  round 0.2 smd paste-10: 1(-0.338,0) 2(0.338,0)
  Signal Layer 1 region: 0.102,0.432 0.178,0.505 0.296,0.467 0.361,0.424 0.434,0.351 0.488,0.292 0.546,0.193 0.574,0.099 0.569,-0.122 0.544,-0.193 0.46,-0.33 0.376,-0.411 0.284,-0.469 0.183,-0.5 0.132,-0.483 0.102,-0.43
  Signal Layer 1 region: -0.102,-0.432 -0.178,-0.505 -0.296,-0.467 -0.361,-0.424 -0.434,-0.351 -0.488,-0.292 -0.546,-0.193 -0.574,-0.099 -0.569,0.122 -0.544,0.193 -0.46,0.33 -0.376,0.411 -0.284,0.469 -0.183,0.5 -0.132,0.483 -0.102,0.43
  Signal Layer 1 lines w0.152: -0.178,0.431 ccw(c-0.068,0) -0.178,-0.431 ; 0.178,0.431 cw(c0.068,0) 0.178,-0.431
  Signal Layer 1 lines w0.203: -0.338,0 0.338,0
SON50P200X200X80-9N [mm]
  rect 0.7x0.3 smd: 1(-1.05,0.75) 2(-1.05,0.25) 3(-1.05,-0.25) 4(-1.05,-0.75) 5(1.05,-0.75) 6(1.05,-0.25) 7(1.05,0.25) 8(1.05,0.75)
  rect 1x1.7 smd: 9(0,0)
  silkscreen extent -1.52,1.28 -1.27,1.52, body extent -1,-1 1,1, height 0.77
SOT95P230X110-3N [mm]
  rect 1.05x0.6 smd: 1(-1.1,0.95) 2(-1.1,-0.95) 3(1.1,0)
  silkscreen extent -1.63,-1.45 0.23,1.5, body extent -1.2,-1.45 1.2,1.45, height 0.95
SOT95P280X145-5N [mm]
  rect 1.2x0.6 smd: 1(-1.25,0.95) 2(-1.25,0) 3(-1.25,-0.95) 4(1.25,-0.95) 5(1.25,0.95)
  silkscreen extent -1.85,-1.45 0.3,1.5, body extent -1.4,-1.45 1.4,1.45, height 1.2

## Part data
C1 C2 C3 C4 C5 C6 C7 C8 C9 C10 C11 C13 C14 C15 C16 C17 C18 C19 C20 C21 C22 C23 C24 C25 C26 C27 C28: library part C0402, "Capacitor, 0402, X5R, ±20%", Manufacturer=N.A., Part Number=C0402-4µ7, Part number IPS="00000001251, 00000007165", Supplier Part Number 1=490-13252-1-ND, Artikkelnr Noca=20039482, Author=rsk, Component Class=Capacitors, ComponentLink1Description=Datasheet, ComponentLink1URL=N.A., ComponentLink2Description="Supplier link", ComponentLink2URL=N.A., Footprint Doc=0402, HelpURL=N.A., LatestRevisionDate=2017-11-09, Manufacturer Part Number=N.A., Note=10V, Pad Count=2, Part number Norautron=N.A., PartId=100200193, Published=2009-05-08, Supplier 1=Digi-Key, Supplier 2=N.A., Supplier Part Number 2=N.A.
C12: library part C0805, "Capacitor, 0805", Manufacturer=N.A., Part Number=C0603-4µ7, Part number IPS=00000007783, Artikkelnr Noca=20069060, Author=rsk, Component Class=Capacitors, ComponentLink1Description=Datasheet, ComponentLink1URL=N.A., ComponentLink2Description="Supplier link", ComponentLink2URL=N.A., Footprint Doc=0603, HelpURL=N.A., LatestRevisionDate=2009-11-23, Manufacturer Part Number=N.A., Note=6.3V, Pad Count=2, Part number Norautron=N.A., PartId=100200274, Published=2009-05-08, Supplier 1=N.A., Supplier 2=N.A., Supplier Part Number 1=N.A., Supplier Part Number 2=N.A.
J1 J2: "0.50mm Pitch SlimStack Receptacle, Surface Mount, Dual Row, Vertical, 2.50mm Stacking Height, Gold Plating with Nickel Barrier, 40 Circuits", Manufacturer_Name=Molex, Mouser Part Number=538-54102-0404, Datasheet Link=https://www.molex.com/pdm_docs/sd/541020404_sd.pdf, Height=2.2mm, Manufacturer_Part_Number=54102-0404, Mouser Price/Stock=https://www.mouser.co.uk/ProductDetail/Molex/54102-0404?qs=QVBMgXxBiLzLp7HESxZcuA%3D%3D, System=Connector
J3 J4: "Connector", Manufacturer_Name=Molex, Datasheet Link=https://www.molex.com/pdm_docs/sd/530470210_sd.pdf, Height=4.2mm, Manufacturer_Part_Number=530470810
J5: "Connector", Manufacturer_Name="JST (JAPAN SOLDERLESS TERMINALS)", Manufacturer_Part_Number=S2B-PH-KL(LF)(SN), Datasheet Link=https://www.jst-mfg.com/product/pdf/eng/ePH.pdf, Height=4.8mm
J6: "Con 12 pins 2x6"
J7: "Connector", Manufacturer_Name="XKB Connectivity", Datasheet Link=https://datasheet.lcsc.com/szlcsc/XKB-SK-3296S-01-L1_C319020.pdf, Height=1.4mm, Manufacturer_Part_Number=SK-3296S-01-L1
Q1 Q2: "MOSFET (N-Channel)", Manufacturer_Name=Nexperia, Mouser Part Number=771-BSS138BKVL, Arrow Part Number=BSS138BKVL, Arrow Price/Stock=https://www.arrow.com/en/products/bss138bkvl/nexperia?region=europe, Datasheet Link=https://assets.nexperia.com/documents/data-sheet/BSS138BK.pdf, Height=1.1mm, Manufacturer_Part_Number=BSS138BKVL, Mouser Price/Stock=https://www.mouser.co.uk/ProductDetail/Nexperia/BSS138BKVL?qs=45Avz0nZxhsC3lw2Q7S%2FBA%3D%3D
R1 R2 R3 R4 R5 R6 R7 R8 R9 R10 R11 R12 R13 R14 R15 R16 R19 R20 R21 R22 R23 R24 R25 R26 R27: library part R0402, "Resistor, 0402, ±1%, 0.05W", Manufacturer=N.A., Part Number=R0201-10k, Part number IPS=00000001255, Artikkelnr Noca=N.A., Author=rsk, Component Class=Resistors, ComponentLink1Description=Datasheet, ComponentLink1URL=N.A., ComponentLink2Description="Supplier link", ComponentLink2URL=N.A., Footprint Doc=0201, HelpURL=N.A., LatestRevisionDate=2014-11-13, Manufacturer Part Number=N.A., Note="Chip Res 1%", Pad Count=2, Part number Norautron=N.A., PartId=100100065, Published=2014-11-13, Supplier 1=N.A., Supplier 2=N.A., Supplier Part Number 1=N.A., Supplier Part Number 2=N.A.
R17 R18: library part R0603, "Resistor, 0603", Manufacturer=N.A., Part Number=R0201-10k, Part number IPS=00000001255, Artikkelnr Noca=N.A., Author=rsk, Component Class=Resistors, ComponentLink1Description=Datasheet, ComponentLink1URL=N.A., ComponentLink2Description="Supplier link", ComponentLink2URL=N.A., Footprint Doc=0201, HelpURL=N.A., LatestRevisionDate=2014-11-13, Manufacturer Part Number=N.A., Note="Chip Res 1%", Pad Count=2, Part number Norautron=N.A., PartId=100100065, Published=2014-11-13, Supplier 1=N.A., Supplier 2=N.A., Supplier Part Number 1=N.A., Supplier Part Number 2=N.A.
S1: "Switch", Manufacturer_Name=Diptronics, Manufacturer_Part_Number=DHN-02F-V-T/R, Mouser Part Number=113-DHN02FVTR, Datasheet Link=https://www.mouser.com/datasheet/2/910/377_DHNF-1571321.pdf, Height=1.65mm, Mouser Price/Stock=https://www.mouser.co.uk/ProductDetail/Diptronics/DHN-02F-V-T-R?qs=MLItCLRbWsyqCqWUbs6C5Q%3D%3D
S2: "Switch", Manufacturer_Name=Diptronics, Manufacturer_Part_Number=DHN-08F-T-V-T/R, Mouser Part Number=113-DHN08FTVTR, Datasheet Link=https://www.mouser.com/datasheet/2/910/377_DHNF-1571321.pdf, Height=1.53mm, Mouser Price/Stock=https://www.mouser.co.uk/ProductDetail/Diptronics/DHN-08F-T-V-T-R?qs=MLItCLRbWsx18ED%2FADfjTQ%3D%3D
SB1: library part "Solderbridge Shorted", "Shorted Solderbridge", Manufacturer=N.A., Artikkelnr Noca=N.A., Author=rsk, Component Class=Connectors, ComponentLink1Description=Datasheet, ComponentLink1URL=N.A., ComponentLink2Description="Supplier link", ComponentLink2URL=N.A., Footprint Doc=Solderbridge_Shorted, HelpURL=N.A., LatestRevisionDate=2012-08-07, Manufacturer Part Number=N.A., Note=N.A., Pad Count=2, Part Number="Solderbridge Shorted", Part number IPS=N.A., Part number Norautron=N.A., PartId=100500459, Published=2012-08-07, Supplier 1=N.A., Supplier 2=N.A., Supplier Part Number 1=N.A., Supplier Part Number 2=N.A.
U1: library part CMP-0841-00002-2, "Low-Noise, 8-Channel, 24-Bit Analog Front-End for Biopotential Measurement, 16 KSPS, -40 to 85 degC, 64-Pin PQFP (PAG-64), RoHS, Tube", Manufacturer="Texas Instruments", Operating Temperature Range (C)="-40 to 85", # Input Channels=8, Architecture=Delta-Sigma, ComponentLink1Description="Manufacturer URL", ComponentLink1URL=http://www.ti.com/, ComponentLink2Description=Datasheet, ComponentLink2URL=http://www.ti.com/lit/ds/symlink/ads1299.pdf, ComponentLink3Description="Package Specification", ComponentLink3URL=http://www.ti.com/lit/ml/mtqf006a/mtqf006a.pdf, DatasheetVersion=SBAS499A, Interface="Serial SPI", Mounting Technology="Surface Mount", PackageDescription="64-Pin Plastic Quad Flatpack, Body 10 x 10 mm, Pitch 0.5 mm", PackageReference=PAG-64, PackageVersion=4040282/C, Packing=PAG0064A, PartNumber=ADS1299IPAG, Reference Mode="Int, Ext", Resolution (Bits)=24, RoHS=TRUE, Sample Rate (max) (KSPS)=16
U2: "Integrated Circuit", Manufacturer_Name="Texas Instruments", Mouser Part Number=595-TLV71311PDBVR, Arrow Part Number=TLV71311PDBVR, Arrow Price/Stock=https://www.arrow.com/en/products/tlv71311pdbvr/texas-instruments, Datasheet Link=http://www.ti.com/lit/gpn/tlv713p, Height=1.45mm, Manufacturer_Part_Number=TLV71311PDBVR, Mouser Price/Stock=https://www.mouser.com/Search/Refine.aspx?Keyword=595-TLV71311PDBVR
U3: "Integrated Circuit", Manufacturer_Name="Texas Instruments", Mouser Part Number=595-LM2775DSGR, Arrow Part Number=LM2775DSGR, Arrow Price/Stock=https://www.arrow.com/en/products/lm2775dsgr/texas-instruments, Datasheet Link=http://www.ti.com/lit/ds/symlink/lm2775.pdf, Height=0.8mm, Manufacturer_Part_Number=LM2775DSGR, Mouser Price/Stock=https://www.mouser.co.uk/ProductDetail/Texas-Instruments/LM2775DSGR?qs=GURawfaeGuBqI9Vb8ZKJyg%3D%3D
U4 U5: library part CMP-0062-01430-3, "Series of Adjustable Micropower Voltage Regulators, 8-pin LLP, Pb-Free", Manufacturer="Texas Instruments", PackageTopMarking=NS*UZXYTT*2951AC, PowerWise=N, ComponentLink1Description="Datasheet URL", ComponentLink1URL=http://www.ti.com/general/docs/lit/getliterature.tsp?genericPartNumber=LP2951-N&fileType=pdf, CompType="LDO IC", PackageDescription="LLP, Plastic, Dual, 4 x 4 x 0.8mm Body, 8 Lead, 0.8mm Pitch, No Pullback", PackageReference=NGT0008A, PinCount=8, RoHS=Y
Z1 Z2 Z3 Z4: "Zener Diode", Manufacturer_Name="Diodes Incorporated", Mouser Part Number=621-GDZ5V1LP3-7, Arrow Part Number=GDZ5V1LP3-7, Arrow Price/Stock=https://www.arrow.com/en/products/gdz5v1lp3-7/diodes-incorporated?region=nac, Datasheet Link=https://www.diodes.com//assets/Datasheets/GDZxVxLP3.pdf, Height=0mm, Manufacturer_Part_Number=GDZ5V1LP3-7, Mouser Price/Stock=https://www.mouser.co.uk/ProductDetail/Diodes-Incorporated/GDZ5V1LP3-7?qs=qY%252BJ5l%2FLT%252BQt9Mx1taPzfg%3D%3D

## Free pads (board coordinates)
  round 2.4 hole 1.2: 1(16.5,20) 1(16.5,54.5) 1(58,20) 1(58,54.5)

## Via types
v1: diameter 0.5, hole 0.3, Signal Layer 1 to Signal Layer 6, 128 vias
v2: diameter 0.5, hole 0.2, Signal Layer 1 to Signal Layer 6, 10 vias

## Nets (pads, with @x,y where several pads share a name; then routed paths per layer and width w, separated by ;. In a path a pad name is that pad's centre, name@x,y a point inside that pad or via, vN(x,y) a via of type N, cw(c..) or ccw(c..) an arc to the next point about the centre after c; other vN are vias at no path point)
3WB_CLK: J2.10 R27.1 | length 7.4
  Signal Layer 1 w0.254: J2.10 46.223,45.227 49.273,45.227 v1(49.3,45.2)
  Signal Layer 6 w0.254: v1(49.3,45.2) 50.9,46.8 R27.1
3WB_CLK': J3.5 R27.2 | length 3.7
  Signal Layer 6 w0.254: R27.2 53.8,46.798 53.848,46.75 J3.5
3WB_DATA: J2.18 J3.3 | length 15.5
  Signal Layer 1 w0.254: J2.18 46.223,47.227 47.973,47.227 v1(48,47.2)
  Signal Layer 6 w0.254: v1(48,47.2) 47.969,47.169 47.969,44.031 49,43 56.25,43 J3.3
3WB_ENB: J2.14 J3.4 | length 13.1
  Signal Layer 1 w0.254: J2.14 46.223,46.227 48.573,46.227 v1(48.6,46.2)
  Signal Layer 6 w0.254: v1(48.6,46.2) 48.6,45.008 49.05,44.558 50.458,44.558 50.469,44.569 51.277,44.569 51.302,44.594 56.594,44.594 J3.4
+1.1V_SCUM: J1.33 J1.34 J1.35 J1.36 J2.33 J2.34 J2.35 J2.36 SB1.2 | length 22.4
  Signal Layer 1 w0.254: SB1.2 v1(21.15,54.425) 21.197,54.378 21.872,54.378 22.85,53.4 22.85,51.75 ; J1.33 J1.34 23.35,51.25 22.85,51.75 ; J1.35 J1.36 22.85,51.75 ; v1(45,51.2) 45.027,51.227 46.177,51.227 J2.34 ; v1(45,52.2) 45.027,52.2 45.446,51.781 45.719,51.781 45.75,51.75 J2.36 ; J2.33 50.823,51.227 51.981,51.227 52.208,51 v1(52.292,51) ; J2.35 52.25,51.75 v1(52.3,51.8)
+1.8V_ADS1299: C11.1 C24.1 C26.1 R15.1 R16.1 R21.2 U1.48 U1.50 U4.1 | length 92.1
  Signal Layer 1 w0.254: v1(15.4,41.8) 15.8,42.2 U4.1 ; U1.50 33.283,51.05 33.683,51.45 v1(33.75,51.45) U1.48 ; R15.1 R16.1
  Signal Layer 1 w0.381: v1(22.8,38.8) 23.6,38 23.6,26.45 30.85,19.2 49.082,19.2 50.4,20.518 R15.1
  Signal Layer 4 w0.381: v1(15.4,41.8) 18.4,38.8 v1(22.8,38.8) 22.8,40.2 23.592,40.992 23.592,50.192 24.85,51.45 v1(33.75,51.45)
  Signal Layer 6 w0.254: v1(15.4,41.8) C24.1 ; C26.1 C26.1@24.1,37.73 ; v1@33.797,51.403 v1(33.75,51.45) 34.622,51.45 34.67,51.498 C11.1
  Signal Layer 6 w0.381: R21.2 v1(22.8,38.8) 22.823,38.777 23.665,38.777 24,38.442 C26.1
+1.8V_SCUM: C28.1 J1.5 J1.6 J1.7 J1.8 J2.5 J2.6 J2.7 J2.8 R25.2 U5.1 | length 25
  Signal Layer 1 w0.254: v1(15.3,35.9) 15.6,36.2 U5.1 ; v1(22.897,44.851) 22.897,44.785 23.12,44.562 23.12,44.541 23.411,44.25 J1.6 ; v1@22.944,44.783 23.717,44.783 23.75,44.75 J1.8 ; v1(27.4,44.8) v1@27.45,44.75 ; J1.5 28.777,44.273 27.927,44.273 v1@27.45,44.75 ; J1.7 v1@27.45,44.75 ; v1(45,44.5) v1@45.067,44.5 ; J2.6 46.177,44.273 45.294,44.273 v1@45.067,44.5 ; J2.8 46.177,44.727 45.294,44.727 v1@45.067,44.5 ; J2.5 50.823,44.227 51.273,44.227 51.281,44.219 52.081,44.219 ; J2.7 50.823,44.727 51.573,44.727 52.081,44.219 ; v1(52.182,43.963) 52.135,44.01 52.135,44.165 52.081,44.219
  Signal Layer 6 w0.254: C28.1 v1(15.3,35.9) 15.3,35.873 14.977,35.55 14.977,34.869 14.969,34.861 14.969,33.831 16.8,32 21.5,32 22.536,33.036 22.536,33.622 22.584,33.67 R25.2
+5V_ADS1299: C19.1 C20.1 C21.1 C22.1 C23.1 R11.2 R20.2 U1.19 U1.21 U1.22 U1.54 U1.56 U1.59 U3.6 | length 78.6
  Signal Layer 1 w0.254: U3.6 20.888,45.65 20.938,45.7 v1(21.9,45.7) ; v1(30.475,48.025) 30.487,48.037 31.862,48.037 U1.56 ; v1(30.5,46.55) U1.59 ; v1(30.5,49.05) U1.54 ; v1(40.503,45.403) 40.57,45.403 40.891,45.082 41.254,45.082 41.286,45.05 U1.19 ; v1(40.769,46.25) 41.567,46.25 ; U1.21 41.767,46.05 41.567,46.25 ; U1.22 43.123,46.548 41.941,46.548 41.689,46.297 41.614,46.297 41.567,46.25 ; R11.2 v1(46,31.3)
  Signal Layer 6 w0.254: C21.1 C21.1@21.215,44.945 ; R20.2@21.9,47.031 v1(21.9,45.7) 21.853,45.653 21.636,45.653 21.215,45.232 C21.1@21.215,44.945 ; 24,42.856 21.878,44.978 21.248,44.978 C21.1@21.215,44.945 ; v1(30.5,49.05) 30.488,49.038 30.488,48.038 v1(30.475,48.025) 30.487,48.012 30.487,46.563 v1(30.5,46.55) 31.175,45.875 33.515,45.875 C19.1 33.527,45.882 C20.1@34.923,45.882 ; C20.1 41.063,45.88 41.234,46.05 ; C23.1 40.875,44.68 40.923,44.728 40.923,44.923 41.267,45.267 ; v1(40.503,45.403) 40.505,45.401 41.133,45.401 41.267,45.267 ; v1(40.769,46.25) 40.816,46.203 41.081,46.203 41.234,46.05 ; 41.234,46.05 41.433,46.25 41.5,46.25 41.5,45.5 41.267,45.267
  Signal Layer 6 w0.381: v1(21.9,45.7) 23.116,45.7 23.293,45.523 29.473,45.523 v1(30.5,46.55) ; 24,42.856 24,40.8 27.8,37 43.6,37 46,34.6 v1(46,31.3)
+EXT_BAT: J3.1 J5.1 J7.3 | length 60
  Signal Layer 1 w0.508: J5.1 16.184,26.291 17.288,26.291 21.55,22.03 ; J7.3 21.55,22.03 ; v1@22.585,22.015 21.565,22.015 21.55,22.03
  Signal Layer 6 w0.508: v1(22.6,22) 24.953,19.647 44.603,19.647 52.408,27.452 52.408,32.227 57.5,37.319 J3.1
+EXT_BAT_SW: C9.2 C16.1 C25.1 C27.1 J7.2 U2.1 U2.3 U3.1 U3.4 U3.5 U3.7 U4.8 U5.8 | length 54.5
  Signal Layer 1 w0.254: v1(16.2,44.5) 16.827,45.127 17.427,45.127 U3.4 ; v1(16.3,47.3) 16.927,46.673 17.427,46.673 U3.1 ; v1(16.399,49.801) 16.45,49.75 U2.3 ; v1(16.5,51.6) 17.5,51.6 U2.1 ; U3.5 19.573,45.127 20.173,45.127 v1(20.4,44.9) ; U3.7 19.573,46.173 20.506,46.173 20.633,46.3 v1(20.7,46.3) ; U5.8 21.063,36.2 21.388,35.875 v1(22.55,35.875) ; U4.8 20.423,42.177 20.573,42.177 20.903,41.847 21.153,41.847 v1(21.2,41.8)
  Signal Layer 1 w0.381: v1(22.55,35.875) 22.55,30.893 22.042,30.385 22.042,25.458 24.55,22.95 J7.2
  Signal Layer 6 w0.254: C9.2 15.715,51.615 16.485,51.615 v1(16.5,51.6) 16.5,51.533 16.399,51.432 v1(16.399,49.801) ; v1(20.7,46.3) C16.1 ; 21.2,42.2 C25.1
  Signal Layer 6 w0.381: v1(16.2,44.5) 16.232,44.5 17.324,45.592 ; v1(16.399,49.801) 16.399,47.431 16.3,47.332 16.3,47.282 17.324,46.258 17.324,45.592 ; 20.398,46.002 19.988,45.592 17.324,45.592 ; v1(20.7,46.3) 20.4,46 20.4,43.032 21.2,42.232 21.2,42.2 21.2,41.362 20.3,40.462 20.3,37.063 21.488,35.875 22.141,35.875 ; C27.1 21.469,36.57 22.141,35.898 22.527,35.898 v1(22.55,35.875)
\C\S\: S2.9 U1.39 | length 30.6
  Signal Layer 1 w0.254: U1.39 38.25,54.55 v1(38.6,54.9)
  Signal Layer 1 w0.381: S2.9 37.067,33.973 37.067,32.633 v1(37.069,32.631)
  Signal Layer 3 w0.254: v1(37.069,32.631) 37.069,32.573 37.973,31.669 39.863,31.669 40.247,32.053 40.247,34.647 40.6,35 40.6,44.414 38.6,46.414 v1(38.6,54.9)
\D\R\D\Y\: S2.5 U1.47 | length 27.6
  Signal Layer 1 w0.254: U1.47 34.25,54.65 v1(34.6,55)
  Signal Layer 1 w0.381: v1(39.601,32.6) 39.603,32.602 39.603,33.973 S2.5
  Signal Layer 3 w0.254: v1(34.6,55) 34.6,49.842 39.331,45.111 39.331,35.246 39.601,34.975 v1(39.601,32.6)
\P\W\D\N: R15.2 S1.A1 U1.35 | length 35.9
  Signal Layer 1 w0.254: U1.35 v1(40.25,56.1) ; v1(50.365,31.44) S1.A1 50.383,29.907 50.383,27.547 R15.2
  Signal Layer 3 w0.254: v1(40.25,56.1) 41.076,56.1 44.369,52.807 44.369,37.436 v1(50.365,31.44)
\R\E\S\E\T\: R16.2 S1.A2 S2.7 U1.36 | length 55.1
  Signal Layer 1 w0.254: v1(39.325,56.825) 39.3,56.8 39.3,55.533 39.75,55.083 U1.36 ; v1(51.65,31.445) 51.635,31.43 S1.A2 51.635,28.365 51.8,28.2 R16.2
  Signal Layer 1 w0.381: S2.7 38.337,33.973 38.337,32.633 v1(38.339,32.631)
  Signal Layer 3 w0.254: v1(39.325,56.825) 41.267,56.825 46.459,51.634 46.459,36.636 v1(51.65,31.445) 50.705,30.5 44.8,30.5 v1(43.8,31.5)
  Signal Layer 4 w0.254: v1(38.339,32.631) 38.386,32.584 38.725,32.584 39.64,31.669 43.631,31.669 v1(43.8,31.5)
BIAS_ELEC: J6.1 R10.1 | length 16.9
  Signal Layer 1 w0.381: R10.1 25.369,35.37 25.385,35.355 25.385,35.285 25.4,35.27 25.4,26.93 J6.1
BIASINV: C5.1 R1.2 U1.61 | length 13.9
  Signal Layer 1 w0.254: C5.1 27.277,37.4 27.5,37.623 v1(27.5,38.7) R1.2 ; v1(30.516,45.584) 30.55,45.55 U1.61
  Signal Layer 6 w0.254: v1(27.5,38.7) 30.831,42.031 30.831,44.561 30.563,44.829 30.563,45.537 v1(30.516,45.584)
BIASOUT: C5.2 R1.1 R10.2 U1.63 | length 14.9
  Signal Layer 1 w0.254: U1.63 31.898,44.527 32.873,44.527 v1(33.5,43.9)
  Signal Layer 1 w0.381: R10.2 25.3,37.201 25.17,37.331 C5.2 R1.1 25.17,38.769 25.514,39.114 25.514,39.116 27.098,40.7 30.3,40.7 v1(33.5,43.9)
DIN: S2.11 U1.34 | length 33.7
  Signal Layer 1 w0.254: U1.34 40.75,54.588 41.05,54.888 v1(41.05,54.925)
  Signal Layer 1 w0.381: S2.11 35.798,33.972 35.798,32.633 v1(35.8,32.631)
  Signal Layer 3 w0.254: v1(35.8,32.631) 37.506,30.925 41.177,30.925 41.9,31.648 41.9,36 41.631,36.269 41.631,52.611 41.05,53.192 v1(41.05,54.925)
DOUT: S2.13 U1.43 | length 29.3
  Signal Layer 1 w0.254: U1.43 36.25,54.95 v1(36.3,55)
  Signal Layer 1 w0.381: S2.13 34.532,33.968 34.532,32.637 v1(34.538,32.631)
  Signal Layer 3 w0.254: v1(34.538,32.631) 34.538,35.292 34.492,35.339 34.492,46.173 33.119,47.546 33.119,54.411 34.339,55.631 35.669,55.631 v1(36.3,55)
GND: C8.1 C9.1 C10.2 C11.2 C12.2 C13.2 C14.2 C15.2 C16.2 C17.2 C19.2 C20.2 C21.2 C22.2 C23.2 C24.2 C25.2 C27.2 J1.1 J1.2 J1.3 J1.4 J1.11 J1.12 J1.15 J1.16 J1.19 J1.20 J1.23 J1.24 J1.27 J1.28 J1.31 J1.32 J1.37 J1.38 J1.39 J1.40 J2.1 J2.2 J2.3 J2.4 J2.11 J2.12 J2.15 J2.16 J2.19 J2.20 J2.23 J2.24 J2.27 J2.28 J2.31 J2.32 J2.37 J2.38 J2.39 J2.40 J3.8 J5.2 J6.2 J6.11 J6.12 J7.1 J7.MP1 J7.MP2 J7.MP3 J7.MP4 pad.1 Q1.2 Q2.2 R12.1 R19.1 R20.1 R22.1 R23.1 R24.1 R26.1 S1.B1 S1.B2 U1.20 U1.23 U1.25 U1.32 U1.33 U1.38 U1.41 U1.49 U1.51 U1.53 U1.57 U1.58 U2.2 U3.8 U3.9 U4.4 U4.9 U5.4 U5.9 | length 17.4
  Signal Layer 1 w0.254: 22.85,49.75 J1.28 ; 22.85,50.75 J1.32 ; J1.38 25.2,52.25 ; J1.40 24.223,52.773 25.2,52.773 ; 27.7,45.5 27.927,45.727 28.777,45.727 J1.11 ; J1.15 28.823,46.773 29.581,46.773 ; Q2.2 29.475,28.275 29.475,27.325 v1(29.5,27.3) ; Q1.2 29.5,32.6 v1(30.6,32.6) ; R12.1 v1(47.5,32.2)
  Signal Layer 1 w0.381: S1.B1 50.383,36.093 50.383,37.882 v1(50.4,37.9) ; v1(51.6,37.9) 51.617,37.883 51.617,36.093 S1.B2
  Signal Layer 6 w0.254: v1(21.1,32.8) 21.1,32.867 21.4,33.167 R26.1 ; C21.2 21.3,44.07 21.623,43.747 21.953,43.747 v1(22,43.7) C25.2
  other v1: 52.9,25.431 31.5,25.5 43.7,27 20.5,27.5 24.5,29.5 30.7,30.5 17,31 22.5,37 29.3,38.7 31.6,38.7 53.444,39.389 43.6,40.2 45.4,40.2 54.9,40.6 27.5,42.5 54.8,43.9 54.8,45.7 18.8,48 36.3,50 30.5,50.2 19,54.5 54.5,54.5 30.4,56.3
  other v2: 18.4,33.8 17.4,35 18.4,35 19.4,35 18.4,36.2 18.5,39.8 17.5,41 18.5,41 19.5,41 18.5,42.2
GPIO0: J1.9 J4.1 | length 40.4
  Signal Layer 1 w0.254: J1.9 28.823,45.273 29.673,45.273 30.2,44.746 v1(30.2,44.3)
  Signal Layer 4 w0.254: v1(30.2,44.3) 30.2,37.6 33.8,34 42.408,34 49.108,27.3 57.45,27.3 J4.1
GPIO1: J1.13 J4.7 S2.2 | length 47.3
  Signal Layer 1 w0.254: v1(27.4,46.3) 27.427,46.273 28.777,46.273 J1.13
  Signal Layer 1 w0.381: v1(42.141,29.11) 42.143,29.109 42.143,27.827 S2.2
  Signal Layer 3 w0.254: v1(42.141,29.11) 51.86,29.11 J4.7
  Signal Layer 4 w0.254: v1(27.4,46.3) 28.3,45.4 28.3,37.8 34.899,31.201 41.099,31.201 42.094,30.206 42.094,29.158 v1(42.141,29.11)
GPIO1': C7.1 Q2.1 S2.1 | length 25.3
  Signal Layer 1 w0.254: Q2.1 27.656,28.194 27.656,27.444 28.431,26.669 30.369,26.669 33.7,30 40.2,30 v1@42.5,32.3 ; v1(45.2,33.1) 45.2,34.1 45.452,34.352 46.022,34.352 46.07,34.4 C7.1
  Signal Layer 1 w0.381: S2.1 42.145,32.687 v1(42.531,32.3)
  Signal Layer 3 w0.254: v1(42.531,32.3) 44.4,32.3 v1(45.2,33.1)
GPIO2: J1.17 J4.8 S2.4 | length 50.3
  Signal Layer 1 w0.254: v1(27.1,47.3) 27.127,47.273 28.777,47.273 J1.17
  Signal Layer 1 w0.381: S2.4 40.72,27.98 40.877,28.138 40.877,29.198 v1(40.879,29.2)
  Signal Layer 3 w0.254: v1(40.879,29.2) 40.926,29.247 40.926,29.526 41.25,29.85 51.35,29.85 J4.8
  Signal Layer 4 w0.254: v1(27.1,47.3) 27.1,47.233 26.769,46.902 26.769,37.546 33.715,30.6 39.476,30.6 40.876,29.2 v1(40.879,29.2)
GPIO2': C6.1 Q1.1 S2.3 | length 24.6
  Signal Layer 1 w0.254: Q1.1 27.581,32.619 27.581,31.719 27.9,31.4 40.031,31.4 40.878,32.247 v1(40.878,32.3) ; S2.3 40.875,34.22 41.424,34.769 41.542,34.769 41.65,34.877 43.055,34.877 45.078,36.9 46.6,36.9 46.882,36.618 46.882,36.048 C6.1
  Signal Layer 1 w0.381: S2.3 40.876,33.974 40.876,32.301 v1(40.878,32.3)
GPIO3: J1.21 J4.2 S2.6 | length 50.6
  Signal Layer 1 w0.254: v1(26.5,48.2) 26.55,48.25 J1.21
  Signal Layer 1 w0.381: v1(39.601,29.2) 39.603,29.198 39.603,28.118 39.458,27.972 S2.6
  Signal Layer 3 w0.254: v1(39.601,29.2) 39.601,29.19 40.312,28.479 54.779,28.479 v1(54.8,28.5)
  Signal Layer 4 w0.254: v1(26.5,48.2) 26.5,48.15 26.2,47.85 26.2,36 32.6,29.6 39.201,29.6 v1(39.601,29.2) ; v1(54.8,28.5) J4.2
GPIO4: J1.25
GPIO5: J1.29 S2.8 | length 34.9
  Signal Layer 1 w0.254: v1(27,50.2) 27.027,50.227 28.777,50.227 J1.29
  Signal Layer 1 w0.381: S2.8 38.338,27.828 38.338,28.896 v1(38.341,28.899)
  Signal Layer 4 w0.254: v1(27,50.2) 25.6,48.8 25.6,34.2 31.5,28.3 37.688,28.3 38.286,28.899 v1(38.341,28.899)
GPIO6: J1.10
GPIO7: J1.14
GPIO8: J1.18
GPIO9: J1.22
GPIO10: J1.26
GPIO11: J1.30 J4.3 S2.10 | length 59.4
  Signal Layer 1 w0.254: J1.30 24.223,50.273 25.473,50.273 v1(25.5,50.3)
  Signal Layer 1 w0.381: S2.10 37.067,27.823 37.067,25.603 37.1,25.57 v1(37.1,25.538)
  Signal Layer 3 w0.254: v1(37.1,25.538) 37.662,26.1 54.1,26.1 56,28 v1(56,29.6)
  Signal Layer 4 w0.254: v1(25.5,50.3) 25.478,50.3 24.9,49.722 24.9,33.2 30.204,27.896 32.857,27.896 35.215,25.538 v1(37.1,25.538) ; v1(56,29.6) 57.35,29.6 J4.3
GPIO12: J2.9 J4.4 S2.12 | length 48.4
  Signal Layer 1 w0.254: J2.9 53.25,45.25 v1(53.275,45.225)
  Signal Layer 1 w0.381: S2.12 35.797,27.823 35.797,26.303 v1(35.8,26.3)
  Signal Layer 4 w0.254: v1(35.8,26.3) 46.96,26.3 47.091,26.169 58.002,26.169 58.5,26.667 58.5,30 J4.4 56.9,31 52.813,35.087 52.813,44.763 v1(53.275,45.225)
GPIO13: J2.13 J4.5 S2.14 | length 52.7
  Signal Layer 1 w0.254: J2.13 52.192,46.25 52.319,46.123 52.946,46.123 v1(52.95,46.119)
  Signal Layer 1 w0.381: v1(34.513,25.348) 34.513,27.812 S2.14
  Signal Layer 4 w0.254: v1(34.513,25.348) 35.061,24.8 57.4,24.8 59.2,26.6 59.2,30.55 J4.5 54.075,35.675 54.075,45.425 53.428,46.072 52.997,46.072 v1(52.95,46.119)
GPIO14: J2.17 J4.6 S2.16 | length 59.7
  Signal Layer 1 w0.254: J2.17 52.002,47.25 52.183,47.431 v1(52.2,47.431)
  Signal Layer 1 w0.381: v1(33.238,25.5) 33.255,25.517 S2.16
  Signal Layer 4 w0.254: v1(33.238,25.5) 33.238,25.433 33.3,25.371 33.3,25.169 33.742,24.727 34.39,24.727 35.16,23.957 35.16,23.084 35.93,22.314 55.914,22.314 60,26.4 60,31 J4.6 55.6,35.4 55.6,46.1 54.269,47.431 v1(52.2,47.431)
GPIO15: J2.21
HARD_RESET: J2.22 J3.2 | length 17
  Signal Layer 1 w0.254: J2.22 v1(47.375,48.25)
  Signal Layer 6 w0.254: v1(47.375,48.25) 47.369,48.244 47.369,43.531 48.8,42.1 56.461,42.1 56.917,42.556 56.979,42.556 57.423,43 J3.2
IN1N: C4.1 R8.2 U1.15 Z2.1 Z4.2 | length 5.3
  Signal Layer 1 w0.254: U1.15 40.75,41.095 41.5,40.345 41.5,39.692 41.47,39.662 41.47,39.525 C4.1
  Signal Layer 1 w0.381: R8.2 41.269,37.33 41.284,37.345 41.284,38.245 41.47,38.431 C4.1
IN1N_CONN: J6.10 R8.1 R17.2 | length 21.7
  Signal Layer 1 w0.381: R8.1@41.215,36.455 41.215,35.516 v1(41.231,35.5) ; v1(46.964,20.936) 46.982,20.954 46.982,22.952 R17.2
  Signal Layer 3 w0.254: J6.10 42.717,22.314 44.55,22.314 45.586,22.314 v1(46.964,20.936)
  Signal Layer 6 w0.254: v1(41.231,35.5) 41.2,35.469 41.2,32.87 41.51,32.56 J6.10
IN1P: C4.2 R9.2 U1.16 Z2.2 Z4.1 | length 5.4
  Signal Layer 1 w0.254: U1.16 41.273,42.152 41.273,41.327 41.912,40.688 41.912,40.325 41.912,39.513 42.282,39.143 42.282,38.548 C4.2
  Signal Layer 1 w0.381: C4.2 42.33,38.431 42.5,38.261 R9.2
IN1P_CONN: J6.9 R9.1 R18.2 | length 27.5
  Signal Layer 1 w0.381: R9.1 42.515,36.455 42.515,35.524 v1(42.531,35.508) ; R18.2 48.715,22.97 48.8,22.885 v1(48.8,19.9)
  Signal Layer 3 w0.254: J6.9 42.79,19.7 48.533,19.7 48.733,19.9 v1(48.8,19.9)
  Signal Layer 6 w0.254: J6.9 42.844,22.314 42.844,29.86 43.162,30.178 43.162,34.877 v1(42.531,35.508)
IN2N: C3.1 R6.2 U1.13 Z1.1 Z3.2 | length 5.2
  Signal Layer 1 w0.191: C3.1 38.97,38.6 39.729,39.359 Z3.2@39.729,39.411 ; U1.13 39.763,42.163 39.763,40.337 Z1.1 Z3.2
  Signal Layer 1 w0.254: R6.2 38.7,37.7 38.922,37.922 38.922,38.452 C3.1
IN2N_CONN: J6.8 R6.1 | length 13.3
  Signal Layer 1 w0.254: R6.1@38.623,36.455 38.667,36.455 R6.1@38.7,36.422
  Signal Layer 1 w0.381: v1(38.7,35.6) R6.1@38.7,36.422
  Signal Layer 6 w0.254: v1(38.7,35.6) 38.7,34.548 38.5,34.348 38.5,33.363 38.97,32.892 38.97,28.939 38.972,28.937 38.972,26.552 38.97,26.551 J6.8
IN2P: C3.2 R7.2 U1.14 Z1.2 Z3.1 | length 5.1
  Signal Layer 1 w0.191: C3.2 39.883,38.553 39.883,39.021 40.135,39.273 40.135,39.505 Z3.1 Z1.2 40.155,40.855 40.25,40.95 U1.14
  Signal Layer 1 w0.254: C3.2 39.878,38.452 39.878,38.022 40,37.9 R7.2
IN2P_CONN: J6.7 R7.1 | length 16.1
  Signal Layer 1 w0.381: v1(39.969,35.5) 39.984,35.515 39.984,36.455 R7.1
  Signal Layer 6 w0.254: J6.7 40.247,22.257 40.247,32.847 40,33.094 40,35.469 v1(39.969,35.5)
IN3N: C2.1 R4.2 U1.11 | length 5.9
  Signal Layer 1 w0.254: R4.2 36.3,37.9 36.422,38.022 36.422,38.452 C2.1 36.5,38.53 36.5,39.1 38.727,41.327 38.727,42.152 U1.11
IN3N_CONN: J6.6 R4.1 | length 13.1
  Signal Layer 1 w0.381: v1(36.3,35.6) R4.1
  Signal Layer 6 w0.254: v1(36.3,35.6) 36.3,35.533 36.431,35.402 36.431,31.036 36.518,30.949 36.518,25.848 36.43,25.76 J6.6
IN3P: C2.2 R5.2 U1.12 | length 5.7
  Signal Layer 1 w0.254: R5.2 37.5,37.8 37.378,37.922 37.378,38.452 C2.2 37.378,38.548 37.378,39.178 39.25,41.05 U1.12
IN3P_CONN: J6.5 R5.1 | length 16.1
  Signal Layer 1 w0.381: v1(37.5,35.6) R5.1
  Signal Layer 6 w0.254: J6.5 37.731,22.281 37.731,28.616 37.708,28.639 37.708,32.884 37.5,33.092 v1(37.5,35.6)
IN4N: C1.1 R2.2 U1.9 | length 7.2
  Signal Layer 1 w0.254: R2.2 33.9,38.23 34.07,38.4 C1.1 34.118,38.548 34.118,39.218 34.6,39.7 35.957,39.7 37.727,41.47 37.727,42.152 U1.9
IN4N_CONN: J6.4 Q1.3 R2.1 | length 18.9
  Signal Layer 1 w0.254: Q1.3 28.673,35.023 28.673,35.431 28.896,35.654 v1(33.861,35.654)
  Signal Layer 1 w0.381: v1(33.861,35.654) 33.861,36.455 33.876,36.47 R2.1
  Signal Layer 6 w0.254: v1(33.861,35.654) 33.869,35.646 33.869,23.541 J6.4
IN4P: C1.2 R3.2 U1.10 | length 6.8
  Signal Layer 1 w0.254: C1.2 34.978,38.548 34.978,38.996 35.278,39.296 36.125,39.296 38.227,41.398 38.227,42.152 U1.10 ; C1.2@34.93,38.534 34.93,38.4 35.1,38.23 R3.2
IN4P_CONN: J6.3 Q2.3 R3.1 | length 29.4
  Signal Layer 1 w0.254: Q2.3 28.5,30.544 28.327,30.717 27.788,30.717 26.7,31.806 26.7,33.577 26.923,33.8 29.2,33.8 30.277,34.877 33.75,34.877 34.377,34.877 v1@35.1,35.6
  Signal Layer 1 w0.381: R3.1 35.111,36.459 35.111,35.611 v1(35.123,35.6)
  Signal Layer 6 w0.254: J6.3 35.168,22.258 35.168,27.683 35.169,27.684 35.169,35.554 v1(35.123,35.6)
NetC6_2: C6.2 R13.1 R17.1 | length 13.3
  Signal Layer 1 w0.254: C6.2 46.07,35.9 44.569,34.399 44.569,30.755 45.07,30.254 R13.1 45.07,26.185 46.825,24.43 R17.1
NetC7_2: C7.2 R14.2 R18.1 | length 10.9
  Signal Layer 1 w0.254: C7.2 46.93,34.4 48.43,32.9 R14.2 48.43,27.4 48.478,27.352 48.5,27.352 48.802,27.05 48.802,24.532 R18.1
NetC8_2: C8.2 R19.2 SB1.1 U2.5 | length 4.3
  Signal Layer 1 w0.254: U2.5 v1(21.15,51.65) SB1.1
  Signal Layer 6 w0.254: v1(21.15,51.65) 21.175,51.675 21.845,51.675 C8.2 R19.2
NetC10_1: C10.1 U1.30 | length 3.5
  Signal Layer 1 w0.254: v1(40.9,51.5) 41.85,50.55 U1.30
  Signal Layer 6 w0.254: C10.1 v1(40.9,51.5)
NetC12_1: C12.1 U1.28 | length 3.1
  Signal Layer 1 w0.254: v1(40.769,49.9) 40.816,49.853 41.478,49.853 41.781,49.55 U1.28
  Signal Layer 6 w0.254: C12.1 v1(40.769,49.9)
NetC13_1: C13.1 U1.24 | length 3.4
  Signal Layer 1 w0.254: v1(41,47.1) 41.45,47.55 U1.24
  Signal Layer 6 w0.254: v1(41,47.1) 41,47.167 40.916,47.251 40.916,47.556 41.252,47.892 41.352,47.892 C13.1
NetC14_1: C14.1 C15.1 U1.55 | length 5.7
  Signal Layer 1 w0.254: U1.55 31.888,48.563 34.963,48.563 v1(34.975,48.575)
  Signal Layer 6 w0.254: C15.1 33.6,47.93 33.648,47.978 33.648,48.273 33.95,48.575 v1(34.975,48.575) 34.988,48.562 34.988,47.942 C14.1
NetC17_1: C17.1 U1.26 | length 3.7
  Signal Layer 1 w0.254: v1(40.2,48.55) U1.26
  Signal Layer 6 w0.254: C17.1 40.187,47.767 40.187,48.537 v1(40.2,48.55)
NetC18_1: C18.1 U3.3 | length 2.3
  Signal Layer 1 w0.254: v1(16.175,45.425) 16.242,45.425 16.467,45.65 U3.3
  Signal Layer 6 w0.254: C18.1 15.335,45.435 16.165,45.435 v1(16.175,45.425)
NetC18_2: C18.2 U3.2 | length 2.3
  Signal Layer 1 w0.254: v1(16.2,46.4) 16.267,46.4 16.517,46.15 U3.2
  Signal Layer 6 w0.254: C18.2 15.335,46.365 16.165,46.365 v1(16.2,46.4)
NetC26_2: C26.2 R24.2 | length 1.1
  Signal Layer 6 w0.381: R24.2 C26.2
NetC28_2: C28.2 R23.2 | length 1
  Signal Layer 6 w0.254: C28.2 R23.2
NetR11_1: R11.1 R12.2 R13.2 R14.1 | length 4.8
  Signal Layer 1 w0.254: R12.2 R11.1 45.978,29.07 45.93,29.022 R13.2 R14.1
NetR21_1: R21.1 R22.2 U4.3 U4.7 | length 14.3
  Signal Layer 1 w0.254: v1(15.296,40.596) 15.3,40.6 U4.3 ; U4.7 20.55,41.4 20.781,41.169 22.102,41.169 22.286,41.353 v1(22.353,41.353)
  Signal Layer 3 w0.254: v1(15.296,40.596) 17.7,43 20.892,43 21.884,42.009 21.884,41.822 v1(22.353,41.353)
  Signal Layer 6 w0.254: R22.2 22.13,40.63 22.353,40.853 ; v1(22.353,41.353) 22.4,41.306 22.4,40.93 22.7,40.63 R21.1
NetR25_1: R25.1 R26.2 U5.3 U5.7 | length 10.9
  Signal Layer 1 w0.254: v1(15.6,34.6) U5.3 ; U5.7 20.306,35.394 21.115,35.394 21.321,35.188 v1(21.388,35.188)
  Signal Layer 6 w0.254: v1(15.6,34.6) 17.031,33.169 18.769,33.169 20.757,35.157 21.357,35.157 v1(21.388,35.188) ; v1@21.374,35.174 21.386,35.162 21.386,34.544 R26.2 ; R26.2@21.663,34.53 R25.1
RSRX: J2.29 J3.6 | length 8
  Signal Layer 1 w0.254: J2.29 50.823,50.227 52.573,50.227 v1(52.6,50.2)
  Signal Layer 6 w0.254: v1(52.6,50.2) 52.6,49.5 54.1,48 J3.6
RSTX: J2.25 J3.7 | length 6.7
  Signal Layer 1 w0.254: J2.25 50.823,49.273 53.773,49.273 v1(53.8,49.3)
  Signal Layer 6 w0.254: v1(53.8,49.3) 53.825,49.275 57.475,49.275 J3.7
SCLK: S2.15 U1.40 | length 32.9
  Signal Layer 1 w0.254: v1(37.7,55.1) 37.75,55.05 U1.40
  Signal Layer 1 w0.381: v1(32.954,32.254) 32.954,32.286 33.255,32.587 S2.15
  Signal Layer 3 w0.254: v1(32.954,32.254) 33,32.3 33,43.33 32.715,43.615 32.715,55.392 33.923,56.6 36.2,56.6 v1(37.7,55.1)
SENSOR_EXT_IN: J2.26
pads on no net: J2.30 J7.MH1 J7.MH2 U1.1 U1.2 U1.3 U1.4 U1.5 U1.6 U1.7 U1.8 U1.17 U1.18 U1.27 U1.29 U1.31 U1.37 U1.42 U1.44 U1.45 U1.46 U1.52 U1.60 U1.62 U1.64 U2.4 U4.2 U4.5 U4.6 U5.2 U5.5 U5.6

## Polygon pours and split planes (outlines as drawn)
+1.1V_SCUM on Signal Layer 2 "SL2_1.1V" (solid, remove dead copper, pour order 2): 11,59 11,17.54 ccw(c13.54,17.54) 13.54,15 61.46,15 ccw(c61.46,17.54) 64,17.54 64,57.46 ccw(c61.46,57.46) 61.46,60 14,60
GND on Signal Layer 3 "SL3_GND" (solid, remove dead copper, pour order 3): 10.9,58.7 10.9,17.24 ccw(c13.44,17.24) 13.44,14.7 61.36,14.7 ccw(c61.36,17.24) 63.9,17.24 63.9,57.16 ccw(c61.36,57.16) 61.36,59.7 13.9,59.7